# Allegro board DPU-A3-0D15 - Copy.brd
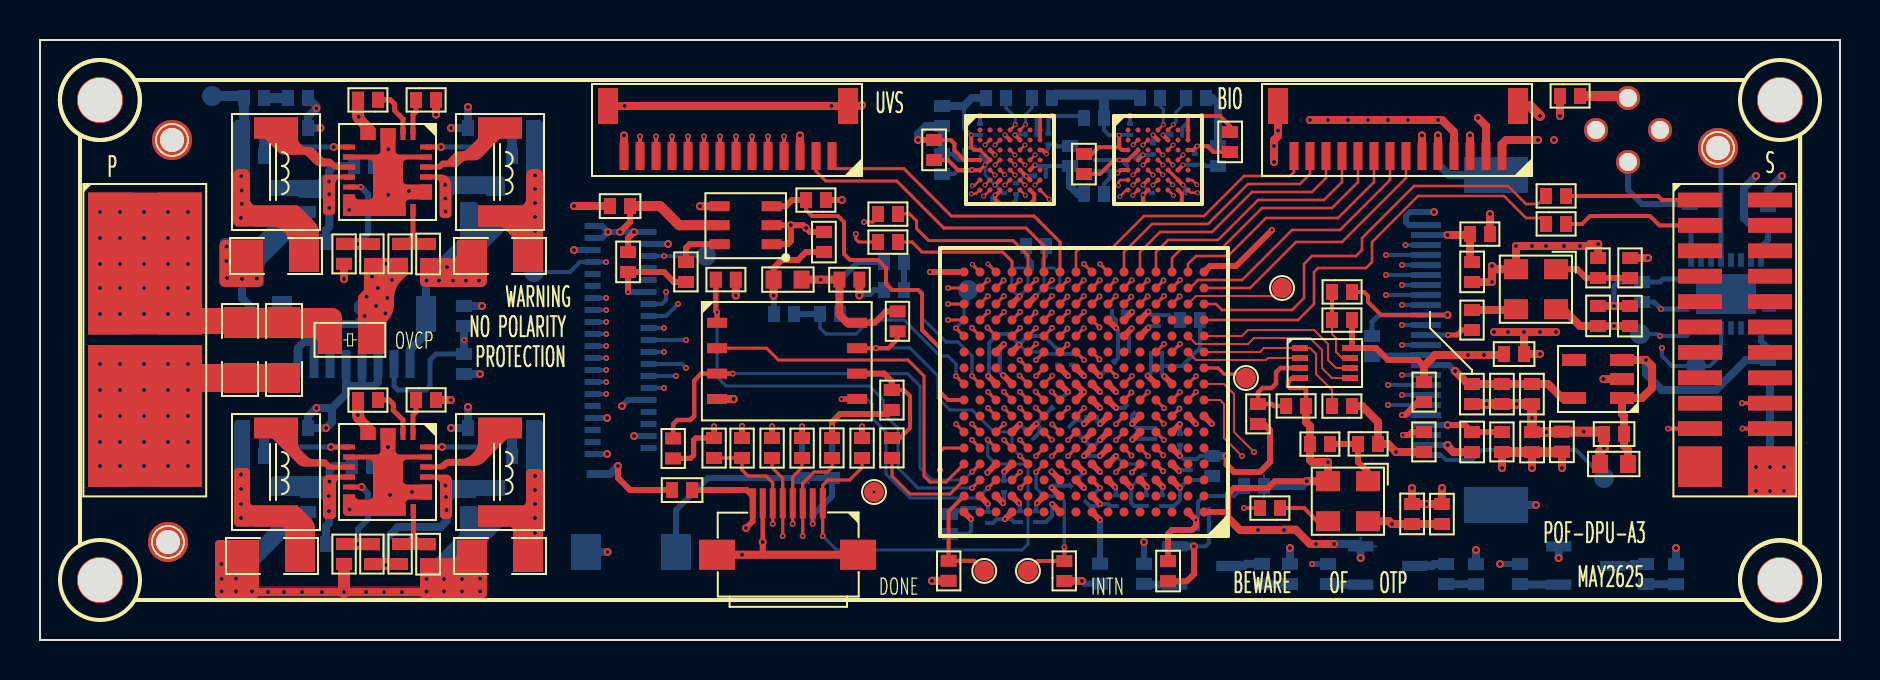
[diagram p0: board, top side]
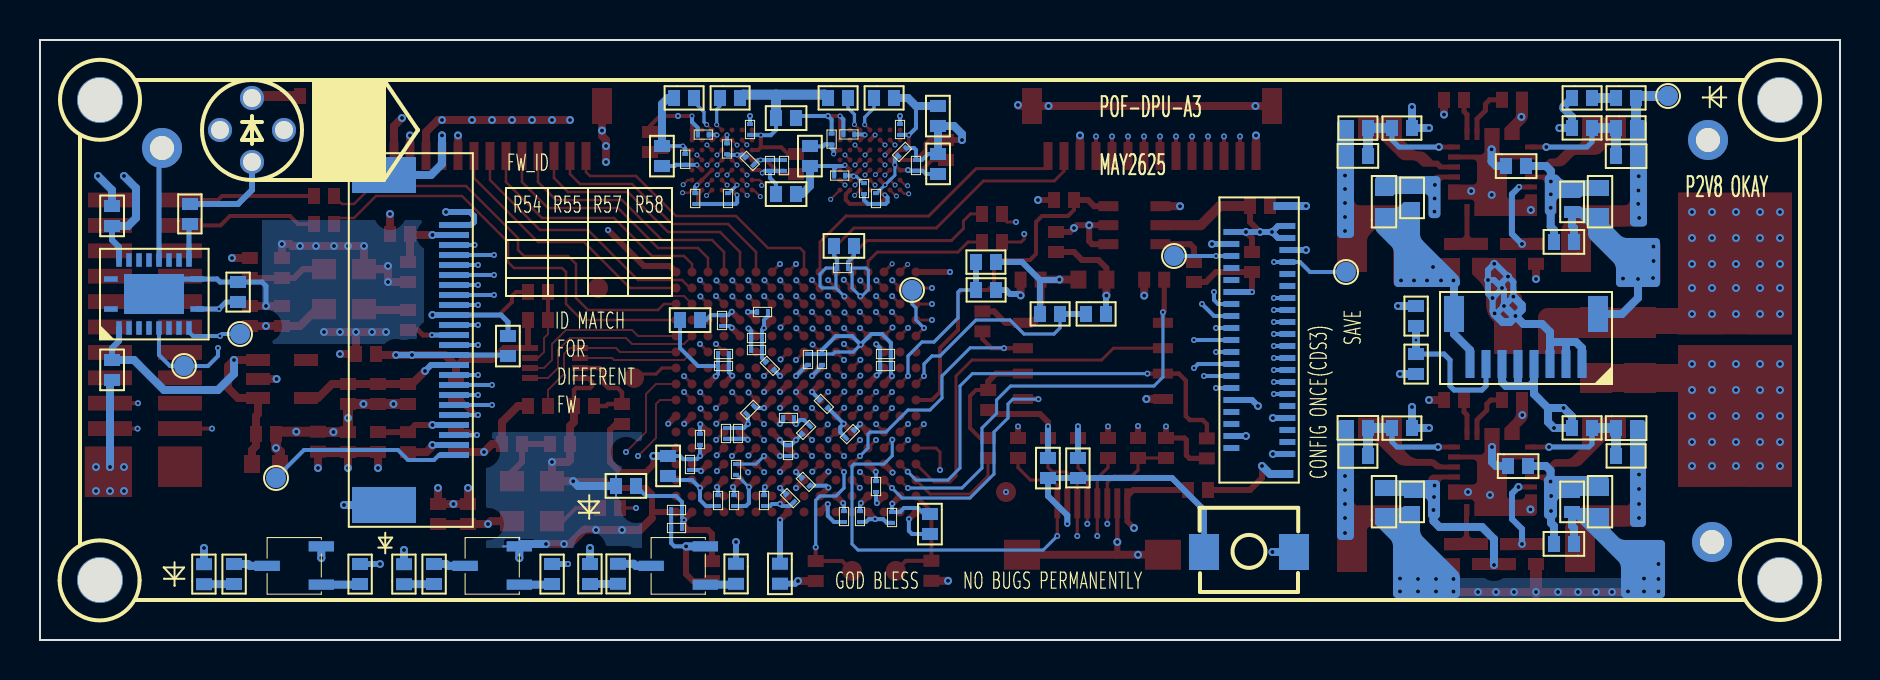
[diagram p1: board, bottom side, seen from below]

Outline 90 x 30 mm; copper layers: TOP, GND-2, SIG-3, VCC-4, GND-5, SIG-6, GND-7, BOTTOM. Coordinates in mm from the lower left corner of the outline.
Outline path: 0,30 90,30 90,0 0,0 0,30

## Design rules (mm)
constraint set DEFAULT: min track width 0.102, pair gap 0.2
net group CK: nets H1_D15 H1_RWDS1
net group DVP_MCLK: nets DVP_MCLK N763219
net group IO_LED_1: nets IO_LED_1 N1593321
net group IO_LED_2: nets IO_LED_2 N1593325
net group IO_LED_3: nets IO_LED_3 N1593329
net group MCLK: nets MCLK N900708
net group MIPI1_CLK: nets MIPI1_CLK+ MIPI1_CLK-
net group MIPI1_D0: nets MIPI1_D0+ MIPI1_D0-
net group MIPI1_D1: nets MIPI1_D1+ MIPI1_D1-
net group MIPI2_CLK: nets MIPI2_CLK+ MIPI2_CLK-
net group MIPI2_D0: nets MIPI2_D0+ MIPI2_D0-
net group MIPI2_D1: nets MIPI2_D1+ MIPI2_D1-
net group N2602705: nets N2602705 N2606298
net group P2V8: nets N1599549 N1613601
net group SYS_CLK: nets N990230 SYS_CLK
net group H1_CK: nets H1_CKN
net group H2_CK: nets H2_CKN
net group MG1: nets H2_CKP H2_D0 H2_D1 H2_D2 H2_D3 H2_D4 H2_D5 H2_D6 H2_D7 H2_D8 H2_D9 H2_D10 H2_D12 H2_D13 H2_D14 H2_D15 H2_RWDS0 H2_RWDS1
net group MG2: nets H1_CKP H1_CS H1_D0 H1_D1 H1_D2 H1_D3 H1_D4 H1_D5 H1_D6 H1_D7 H1_D8 H1_D9 H1_D10 H1_D11 H1_D12 H1_D13 H1_D14 H1_RWDS0
net group MG_BT1120: nets BT1120_CLK BT1120_D0 BT1120_D1 BT1120_D2 BT1120_D3 BT1120_D4 BT1120_D5 BT1120_D6 BT1120_D7 SYNC_O
net group MG_DATABUS_0_7: nets H2_D11
net group MG_DATABUS_8_15: nets IR_D2
net group MG_DVP: nets DVP_D0 DVP_D1 DVP_D2 DVP_D3 DVP_D4 DVP_D5 DVP_D6 DVP_D7 DVP_HSYNC DVP_PCLK DVP_VSYNC
net group MG_IR_CAM: nets IR_D0 IR_D1 IR_D3 IR_D4 IR_D5 IR_D6 IR_D7 IR_D8 IR_D9 IR_D10 IR_D11 IR_D12 IR_D13 IR_HSYNC IR_PCLK IR_VSYNC
net group P1V2: nets N2071731 N2071821 P1V2
nets with their own width: min track width 0.102; nets N849077

## Placement (name value [footprint] x y rotation side)
C1  10uF  [C0402_SMT]  59.5 24.4 90 top
C2  10uF  [C0402_SMT]  44.7 24 90 top
C3  10uF  [C0402_SMT]  52.2 24.3 270 top
C4  10uF  [C0402_SMT]  28.5 21.7 0 top
C5  10uF  [C0402_SMT]  39.2 20.4 270 top
C6  1uF  [C0402_SMT]  19.4 18.8 90 top
C7  33uF  [C1206_SMT]  13.4 20 180 top
C8  47uF  [C1206_SMT]  24.6 20 180 top
C9  10uF  [C0402_SMT]  29.4 18.4 90 top
C10  0.1uF  [C0402_SMT]  71.6 17.9 90 top
C11  22uF  [C0603_SMT]  36.68 18.02 0 top
C12  0.1uF  [C0402_SMT]  39.97 18.02 0 top
C13  0.1uF  [C0402_SMT]  77.9 15.7 90 top
C14  10uF  [C0402_SMT]  79.5 16.7 270 top
C15  33uF  [C1206_SMT]  9.2 16.1 270 top
C16  33uF  [C1206_SMT]  11.4 16.1 270 top
C17  0.1uF  [C0402_SMT]  73.2 14.3 0 top
C18  0.1uF  [C0402_SMT]  71.6 12.8 270 top
C19  10uF  [C0402_SMT]  73.1 12.8 270 top
C20  10uF  [C0402_SMT]  74.6 12.8 270 top
C21  0.1uF  [C0402_SMT]  78.2 10.3 0 top
C22  0.1uF  [C0402_SMT]  71.6 9.39 90 top
C23  10uF  [C0402_SMT]  74.6 9.39 90 top
C24  10uF  [C0402_SMT]  76.1 10.41 270 top
C25  22uF  [C0603_SMT]  79.4 8.8 180 top
C26  10uF  [C0402_SMT]  31.6 7.5 0 top
C27  0.1uF  [C0402_SMT]  68.6 5.8 90 top
C28  10uF  [C0402_SMT]  70.1 6.8 270 top
C29  1uF  [C0402_SMT]  19.4 3.79 90 top
C30  33uF  [C1206_SMT]  13.2 5 180 top
C31  47uF  [C1206_SMT]  24.6 5 180 top
C32  10uF  [C0402_SMT]  56.4 2.94 90 top
C33  10uF  [C0402_SMT]  45.1 26.7 270 bottom
C34  10uF  [C0402_SMT]  53.2 26.1 180 bottom
C35  0.1uF  [C0201_SMT]  57.24 21.8 90 bottom
C36  0.1uF  [C0201_SMT]  54.5 25.8 270 bottom
C37  0.1uF  [C0201_SMT]  49.83 25.28 180 bottom
C38  0.1uF  [C0201_SMT]  47 25.8 270 bottom
C39  0.1uF  [C0201_SMT]  54.32 23.76 45 bottom
C40  0.1uF  [C0201_SMT]  46.7 24.6 315 bottom
C41  39pF  [C0402_SMT]  23.6 24.2 0 bottom
C42  20pF  [C0402_SMT]  11.2 24.2 180 bottom
C43  10uF  [C0402_SMT]  58.9 24.7 270 bottom
C44  10uF  [C0402_SMT]  51.5 24.7 270 bottom
C45  0.1uF  [C0201_SMT]  57.74 23.76 90 bottom
C46  0.1uF  [C0201_SMT]  50.42 25.32 270 bottom
C47  0.1uF  [C0201_SMT]  55.65 24.83 270 bottom
C48  0.1uF  [C0201_SMT]  50.29 23.22 180 bottom
C49  10uF  [C0402_SMT]  45.1 23.3 90 bottom
C50  0.1uF  [C0201_SMT]  53.5 24 270 bottom
C51  0.1uF  [C0201_SMT]  52.8 24 270 bottom
C52  0.1uF  [C0201_SMT]  46.2 24 270 bottom
C53  10uF  [C0402_SMT]  16.7 23.7 180 bottom
C54  0.1uF  [C0201_SMT]  57.11 25.27 180 bottom
C55  0.1uF  [C0201_SMT]  48.8 22.3 90 bottom
C56  10uF  [C0402_SMT]  53.2 22.3 180 bottom
C57  0.1uF  [C0402_SMT]  21.4 21.6 90 bottom
C58  0.1uF  [C0201_SMT]  55.6 21.8 90 bottom
C59  0.1uF  [C0201_SMT]  48.2 21.8 90 bottom
C60  22uF  [C0603_SMT]  22.8 21.2 90 bottom
C61  22uF  [C0603_SMT]  12 21.2 90 bottom
C62  0.1uF  [C0402_SMT]  13.4 21.4 90 bottom
C63  0.1uF  [C0402_SMT]  86.4 20.7 90 bottom
C64  10uF  [C0402_SMT]  13.3 19.9 0 bottom
C65  10uF  [C0402_SMT]  49.3 19.7 0 bottom
C66  4.7uF  [C0201_SMT]  49.6 18.6 0 bottom
C67  0.1uF  [C0201_SMT]  53.6 16.4 0 bottom
C68  10uF  [C0402_SMT]  58 16 180 bottom
C69  4.7uF  [C0201_SMT]  55.9 15.7 90 bottom
C70  0.1uF  [C0201_SMT]  53.9 15.1 0 bottom
C71  0.1uF  [C0402_SMT]  66.6 15.2 270 bottom
C72  4.7uF  [C0201_SMT]  53.9 14.5 0 bottom
C73  4.7uF  [C0201_SMT]  56.1 14.3 180 bottom
C74  0.1uF  [C0201_SMT]  48 14.3 180 bottom
C75  4.7uF  [C0201_SMT]  51.6 14.3 270 bottom
C76  0.1uF  [C0201_SMT]  50.9 14.3 270 bottom
C77  4.7uF  [C0201_SMT]  53.7 13.9 225 bottom
C78  0.1uF  [C0201_SMT]  56.1 13.7 180 bottom
C79  0.1uF  [C0201_SMT]  47.45 13.7 0 bottom
C80  0.1uF  [C0402_SMT]  86.4 13 90 bottom
C81  0.1uF  [C0201_SMT]  51 12 225 bottom
C82  0.1uF  [C0201_SMT]  54.3 11.7 315 bottom
C83  0.1uF  [C0201_SMT]  52.3 11.1 0 bottom
C84  200pF  [C0402_SMT]  23.6 10.6 0 bottom
C85  100pF  [C0402_SMT]  11.2 10.6 180 bottom
C86  0.1uF  [C0201_SMT]  51.5 10.7 315 bottom
C87  0.1uF  [C0201_SMT]  55.7 10.6 270 bottom
C88  4.7uF  [C0201_SMT]  55.1 10.6 270 bottom
C89  4.7uF  [C0201_SMT]  49.7 10.1 135 bottom
C90  0.1uF  [C0201_SMT]  57 10.3 270 bottom
C91  4.7uF  [C0201_SMT]  52.6 9.2 90 bottom
C92  0.1uF  [C0201_SMT]  57.5 8.5 90 bottom
C93  10uF  [C0402_SMT]  58.6 8.2 90 bottom
C94  10uF  [C0402_SMT]  16.6 8.7 180 bottom
C95  470nF  [C0402_SMT]  39.6 9.1 270 bottom
C96  0.1uF  [C0201_SMT]  55.2 8.8 270 bottom
C97  0.1uF  [C0201_SMT]  51.9 8.1 225 bottom
C98  10uF  [C0402_SMT]  60.2 7.7 0 bottom
C99  0.1uF  [C0201_SMT]  48.2 7.4 90 bottom
C100  0.1uF  [C0201_SMT]  52.3 6.9 45 bottom
C101  0.1uF  [C0201_SMT]  56.1 6.7 90 bottom
C102  0.1uF  [C0201_SMT]  55.3 6.7 90 bottom
C103  4.7uF  [C0201_SMT]  53.8 6.7 90 bottom
C104  22uF  [C0603_SMT]  22.8 6.2 90 bottom
C105  22uF  [C0603_SMT]  12 6.2 90 bottom
C106  0.1uF  [C0402_SMT]  21.4 6.4 90 bottom
C107  0.1uF  [C0402_SMT]  13.4 6.4 90 bottom
C108  0.1uF  [C0201_SMT]  57.9 6.5 0 bottom
C109  0.1uF  [C0201_SMT]  49.8 5.9 90 bottom
C110  0.1uF  [C0201_SMT]  49 5.9 90 bottom
C111  0.1uF  [C0201_SMT]  47.4 6.4 270 bottom
C112  10uF  [C0402_SMT]  45.5 6.3 270 bottom
C113  0.1uF  [C0201_SMT]  57.9 5.6 0 bottom
C114  10uF  [C0402_SMT]  13.3 4.8 0 bottom
C115  10uF  [C0402_SMT]  53 3.82 270 bottom
D1  LED  [LED0402_SMT]  11.2 27.1 180 bottom
D2  LED  [LED0402_SMT]  62.5 2.8 90 bottom
D3  LED  [LED0402_SMT]  81.8 2.79 90 bottom
D4  LED  [LED0402_SMT]  71.8 2.79 90 bottom
F1  1AMP  [R0805]  14.5 15 0 top
FB1  BLM15PD121SN1D  [L0402_SMT]  72.5 20.3 180 top
FB2  BLM15PD121SN1D  [L0402_SMT]  73.1 9.4 90 top
J1  CONN-1X14P-0.8MM  [CONN-1X14P-0D8]  39.6 24.2 180 top
J2  CONN-1X14P-0.8MM  [CONN-1X14P-0D8]  73.1 24.2 180 top
J3  CONN-24P  [SMD_CONN_2X12P_1D27]  7 22 270 top
J4  CONN-24P  [SMD_CONN_2X12P_1D27]  86.5 22 270 top
J5  CONN-1X8  [FPC-0D5-8P]  39.14 6.84 180 top
J6  CONN-1X8P-0.8MM  [CONN-1X8P-0D8]  12.9 13.8 0 bottom
J7  Hirose FH35C-39S-0.3SHW  [FH35C-39S-0D3SHW]  27.63 15 90 bottom
J8  FPC-05F-24PH20  [FPC-0D5-24P]  69.3 20.75 270 bottom
L1  1uH/1A  [IND_SMD_4D4X4D2]  11.8 25.6 270 top
L2  1uH/1A  [IND_SMD_4D4X4D2]  23 25.6 270 top
L3  1uH/1A  [IND_SMD_4D4X4D2]  11.8 10.6 270 top
L4  1uH/1A  [IND_SMD_4D4X4D2]  23 10.6 270 top
LD1  LaserDiode  [LD_CIR_THR_4P]  79.4 25.5 270 bottom
NOREF  -  [unnamed]  87 3 0 top
NOREF#2  -  [#2]  0 30 0 top
NOREF#3  -  [unnamed]  87 27 0 top
NOREF#4  -  [unnamed]  3 27 0 top
NOREF#5  -  [unnamed]  3 3 0 top
NOREF#6  -  [#2]  0 0 90 top
Q1  MMBT2222ALT1G  [SOT-23-3]  75.5 2.29 90 bottom
Q2  MMBT2222ALT1G  [SOT-23-3]  65.6 2.29 90 bottom
Q3  MMBT2222ALT1G  [SOT-23-3]  56.3 2.29 90 bottom
R1  DNI  [R0402_SMT]  76 27.2 0 top
R2  10K  [R0402_SMT]  16.9 27.01 180 top
R3  10K  [R0402_SMT]  18.8 27 0 top
R4  0R  [R0402_SMT]  75.3 22.2 0 top
R5  100K  [R0402_SMT]  39.3 22 180 top
R6  0R  [R0402_SMT]  42.9 21.3 180 top
R7  0R  [R0402_SMT]  75.3 20.8 0 top
R8  0R  [R0402_SMT]  42.9 19.9 180 top
R9  DNP  [R0402_SMT]  15.2 19.81 270 top
R10  0R  [R0402_SMT]  16.6 18.8 90 top
R11  10R  [R0402_SMT]  18 19.81 270 top
R12  DNP  [R0402_SMT]  77.91 18.1 90 top
R13  0R  [R0402_SMT]  79.5 18.1 90 top
R14  1K  [R0402_SMT]  32.3 17.9 90 top
R15  4.7K  [R0402_SMT]  33.79 18.02 0 top
R16  DNP  [R0402_SMT]  64.6 17.4 0 top
R17  10K  [R0402_SMT]  65.6 16 180 top
R18  33R  [R0402_SMT]  71.59 16.5 270 top
R19  4.7K  [R0402_SMT]  42.88 15.43 90 top
R20  10K  [R0402_SMT]  69.2 12.9 270 top
R21  10K  [R0402_SMT]  18.8 12 0 top
R22  10K  [R0402_SMT]  16.9 12 180 top
R23  DNP  [R0402_SMT]  42.59 12.5 270 top
R24  DNP  [R0402_SMT]  62.3 11.7 0 top
R25  10K  [R0402_SMT]  65.6 11.7 180 top
R26  10K  [R0402_SMT]  60.9 10.8 90 top
R27  10K  [R0402_SMT]  69.2 9.4 90 top
R28  0R  [R0402_SMT]  65.9 9.8 0 top
R29  DNP  [R0402_SMT]  64.5 9.8 180 top
R30  2.2K  [R0402_SMT]  39.6 9.1 90 top
R31  33R  [R0402_SMT]  42.6 9.1 90 top
R32  1K  [R0402_SMT]  33.7 10.1 270 top
R33  DNP  [R0402_SMT]  35.1 10.1 270 top
R34  4.7K  [R0402_SMT]  36.6 10.1 270 top
R35  4.7K  [R0402_SMT]  38.1 10.1 270 top
R36  4.7K  [R0402_SMT]  41.1 10.1 270 top
R37  4.7K  [R0402_SMT]  31.66 10.08 270 top
R38  33R  [R0402_SMT]  62 6.6 180 top
R39  DNP  [R0402_SMT]  15.2 4.8 270 top
R40  0R  [R0402_SMT]  16.6 3.79 90 top
R41  10R  [R0402_SMT]  18 4.8 270 top
R42  4.7K  [R0402_SMT]  45.43 3.96 270 top
R43  4.7K  [R0402_SMT]  51.22 2.95 90 top
R44  2.2K  [R0402_SMT]  58.3 27.1 180 bottom
R45  2.2K  [R0402_SMT]  56 27.1 180 bottom
R46  2.2K  [R0402_SMT]  50.6 27.1 180 bottom
R47  2.2K  [R0402_SMT]  48.3 27.1 180 bottom
R48  20K  [R0402_SMT]  13.4 27.1 180 bottom
R49  48K  [R0402_SMT]  13.4 25.6 180 bottom
R50  120K  [R0402_SMT]  11.2 25.6 180 bottom
R51  125K  [R0402_SMT]  23.6 25.6 0 bottom
R52  100K  [R0402_SMT]  21.4 25.6 0 bottom
R53  DNI  [R0402_SMT]  82.5 20.8 90 bottom
R54  DNP  [R0402_SMT]  42.2 18.9 0 bottom
R55  0R  [R0402_SMT]  43.2 17.5 180 bottom
R56  100K  [R0402_SMT]  80.1 17.9 270 bottom
R57  DNP  [R0402_SMT]  40 16.3 180 bottom
R58  0R  [R0402_SMT]  37.7 16.3 180 bottom
R59  DNP  [R0402_SMT]  21.2 16.7 270 bottom
R60  100K  [R0402_SMT]  21.2 14.3 270 bottom
R61  100K  [R0402_SMT]  13.4 10.6 180 bottom
R62  100K  [R0402_SMT]  21.4 10.6 0 bottom
R63  49.9K  [R0402_SMT]  11.2 9.2 180 bottom
R64  24.9K  [R0402_SMT]  23.6 9.2 0 bottom
R65  4.7K  [R0402_SMT]  38.1 8.1 90 bottom
R66  20K  [R0402_SMT]  61.1 3.81 270 bottom
R67  1K  [R0402_SMT]  55.2 3.81 270 bottom
R68  20K  [R0402_SMT]  80.3 3.8 270 bottom
R69  1K  [R0402_SMT]  74 3.8 270 bottom
R70  20K  [R0402_SMT]  70.3 3.8 270 bottom
R71  1K  [R0402_SMT]  64.4 3.8 270 bottom
SW1  SW KEY-SPST  [SW_SMD_2P_L3D9_W3D0_P4D5]  27.3 4.4 0 bottom
TP1  T POINT R  [TP_THR_CIR_2D0_1D2]  6.6 25 0 top
TP2  T POINT R  [TP_THR_CIR_2D0_1D2]  83.9 24.6 0 top
TP3  T POINT F  [TP_SMD_1D0_NP]  62.1 17.6 0 top
TP4  T POINT F  [TP_SMD_1D0_NP]  60.3 13.1 0 top
TP5  T POINT F  [TP_SMD_1D0_NP]  41.7 7.4 0 top
TP6  T POINT R  [TP_THR_CIR_2D0_1D2]  6.4 4.9 0 top
TP7  T POINT F  [TP_SMD_1D0_NP]  47.21 3.45 0 top
TP8  T POINT F  [TP_SMD_1D0_NP]  49.4 3.45 0 top
TP9  T POINT F  [TP_SMD_1D0_NP]  8.6 27.2 180 bottom
TP10  T POINT F  [TP_SMD_1D0_NP]  46.4 17.5 180 bottom
TP11  T POINT F  [TP_SMD_1D0_NP]  80 15.3 180 bottom
TP12  T POINT F  [TP_SMD_1D0_NP]  82.8 13.7 180 bottom
TP13  T POINT F  [TP_SMD_1D0_NP]  78.2 8.1 180 bottom
TP14  T POINT F  [TP_SMD_1D0_NP]  33.3 19.2 180 bottom
TP15  T POINT F  [TP_SMD_1D0_NP]  24.7 18.4 180 bottom
U1  W958D6NBKX4I  [WFBGA-49]  47 25.5 0 top
U2  W958D6NBKX4I  [WFBGA-49]  54.4 25.5 0 top
U3  MAX20416ATGD/V+  [TQFN-24]  17.4 23.4 180 top
U4  TPS22995HQDDCRQ1  [SOT-23-6]  36.58 19.79 180 top
U5  W25Q64JWSSIQ  [SOP-8-208MIL]  40.85 15.86 270 top
U6  CAT25512HU5I-GT3  [UDFN-8-2X3]  65.5 14.6 270 top
U7  TLV75515PDBVR  [SOT-23-5]  79.1 12.1 180 top
U8  LIFCL-40-7BG256I  [CABGA-256]  58.2 6.4 180 top
U9  MAX20416ATGD/V+  [TQFN-24]  17.4 8.4 180 top
U10  TXS0108ERGYR  [VQFN-20]  84.3 17.3 180 bottom
Y1  24.0MHz  [SMD2520-4P]  74.8 17.5 180 top
Y2  25.0MHz  [SMD2520-4P]  65.4 6.9 180 top

## Library data of the parts
C1-C6 C9 C10 C12-C14 C17 C18 C20-C24 C26-C29 C32-C115 = CAP NP: signal model: DEFAULT_CAPACITOR_1e+07pF_2_1
C7 C8 C11 C15 C16 C19 C25 C30 C31 = CAP NP: signal model: DEFAULT_CAPACITOR_2.2e+07pF_2_1
D1-D4 = LED
F1 = FUSE
FB1 FB2 = INDUCTOR
J1 J2 = CONN-1X14P
J3 J4 = CONN-24P
J5 = CONN-1X8
J6 = CONN-1X8P
J7 = HiroseFPC_0
J8 = OV5640-FPC-24P-DVP
L1-L4 = INDUCTOR: signal model: DEFAULT_INDUCTOR_4700nH_2_1
LD1 = LaserDiode_0
Q1-Q3 = MMBT2222AL
R1-R3 R9-R13 R15-R47 R49-R65 R67 R69 R71 = R: signal model: DEFAULT_RESISTOR_10000OHM_2_1
R4-R8 R14 R48 R66 R68 R70 = R
SW1 = SW KEY-SPST
TP1 TP2 TP6 = T POINT R
TP3-TP5 TP7-TP15 = T POINT F
U1 U2 = W958D6NBKX4I
U3 U9 = MAX20416ATGD/V+
U4 = TPS22995H-Q1
U5 = GD25Q128ESIGR
U6 = CAT25512HU5I-GT3
U7 = TLV75515PDBVR
U8 = LIFCL-40-BG256
U10 = TXS0108ERGYR
Y1 Y2 = OSCILLATOR

## Footprints (pads in the part's own frame, mm; a bottom-side part is the same pattern mirrored in y, then rotated)
C0201_SMT
  rect 0.2x0.3 smd: 1(0,0) 2(0.544,0)
C0402_SMT
  rect 0.6x0.8 smd: 1(0,0) 2(1,0)
C0603_SMT
  rect 0.8x0.9 smd: 1(0,0) 2(1.4,0)
C1206_SMT
  rect 1.5x1.6 smd: 1(0.2,0.8) 2(3,0.8)
CABGA-256
  round 0.45 smd: A1(0,0) A2(0.8,0) A3(1.6,0) A4(2.4,0) A5(3.2,0) A6(4,0) A7(4.8,0) A8(5.6,0) A9(6.4,0) A10(7.2,0) A11(8,0) A12(8.8,0) A13(9.6,0) A14(10.4,0) A15(11.2,0) A16(12,0) B1(0,-0.8) B2(0.8,-0.8) B3(1.6,-0.8) B4(2.4,-0.8) B5(3.2,-0.8) B6(4,-0.8) B7(4.8,-0.8) B8(5.6,-0.8) B9(6.4,-0.8) B10(7.2,-0.8) B11(8,-0.8) B12(8.8,-0.8) B13(9.6,-0.8) B14(10.4,-0.8) B15(11.2,-0.8) B16(12,-0.8) C1(0,-1.6) C2(0.8,-1.6) C3(1.6,-1.6) C4(2.4,-1.6) C5(3.2,-1.6) C6(4,-1.6) C7(4.8,-1.6) C8(5.6,-1.6) C9(6.4,-1.6) C10(7.2,-1.6) C11(8,-1.6) C12(8.8,-1.6) C13(9.6,-1.6) C14(10.4,-1.6) C15(11.2,-1.6) C16(12,-1.6) D1(0,-2.4) D2(0.8,-2.4) D3(1.6,-2.4) D4(2.4,-2.4) D5(3.2,-2.4) D6(4,-2.4) D7(4.8,-2.4) D8(5.6,-2.4) D9(6.4,-2.4) D10(7.2,-2.4) D11(8,-2.4) D12(8.8,-2.4) D13(9.6,-2.4) D14(10.4,-2.4) D15(11.2,-2.4) D16(12,-2.4) E1(0,-3.2) E2(0.8,-3.2) E3(1.6,-3.2) E4(2.4,-3.2) E5(3.2,-3.2) E6(4,-3.2) E7(4.8,-3.2) E8(5.6,-3.2) E9(6.4,-3.2) E10(7.2,-3.2) E11(8,-3.2) E12(8.8,-3.2) E13(9.6,-3.2) E14(10.4,-3.2) E15(11.2,-3.2) E16(12,-3.2) F1(0,-4) F2(0.8,-4) F3(1.6,-4) F4(2.4,-4) F5(3.2,-4) F6(4,-4) F7(4.8,-4) F8(5.6,-4) F9(6.4,-4) F10(7.2,-4) F11(8,-4) F12(8.8,-4) F13(9.6,-4) F14(10.4,-4) F15(11.2,-4) F16(12,-4) G1(0,-4.8) G2(0.8,-4.8) G3(1.6,-4.8) G4(2.4,-4.8) G5(3.2,-4.8) G6(4,-4.8) G7(4.8,-4.8) G8(5.6,-4.8) G9(6.4,-4.8) G10(7.2,-4.8) G11(8,-4.8) G12(8.8,-4.8) G13(9.6,-4.8) G14(10.4,-4.8) G15(11.2,-4.8) G16(12,-4.8) H1(0,-5.6) H2(0.8,-5.6) H3(1.6,-5.6) H4(2.4,-5.6) H5(3.2,-5.6) H6(4,-5.6) H7(4.8,-5.6) H8(5.6,-5.6) H9(6.4,-5.6) H10(7.2,-5.6) H11(8,-5.6) H12(8.8,-5.6) H13(9.6,-5.6) H14(10.4,-5.6) H15(11.2,-5.6) H16(12,-5.6) J1(0,-6.4) J2(0.8,-6.4) J3(1.6,-6.4) J4(2.4,-6.4) J5(3.2,-6.4) J6(4,-6.4) J7(4.8,-6.4) J8(5.6,-6.4) J9(6.4,-6.4) J10(7.2,-6.4) J11(8,-6.4) J12(8.8,-6.4) J13(9.6,-6.4) J14(10.4,-6.4) J15(11.2,-6.4) J16(12,-6.4) K1(0,-7.2) K2(0.8,-7.2) K3(1.6,-7.2) K4(2.4,-7.2) K5(3.2,-7.2) K6(4,-7.2) K7(4.8,-7.2) K8(5.6,-7.2) K9(6.4,-7.2) K10(7.2,-7.2) K11(8,-7.2) K12(8.8,-7.2) K13(9.6,-7.2) K14(10.4,-7.2) K15(11.2,-7.2) K16(12,-7.2) L1(0,-8) L2(0.8,-8) L3(1.6,-8) L4(2.4,-8) L5(3.2,-8) L6(4,-8) L7(4.8,-8) L8(5.6,-8) L9(6.4,-8) L10(7.2,-8) L11(8,-8) L12(8.8,-8) L13(9.6,-8) L14(10.4,-8) L15(11.2,-8) L16(12,-8) M1(0,-8.8) M2(0.8,-8.8) M3(1.6,-8.8) M4(2.4,-8.8) M5(3.2,-8.8) M6(4,-8.8) M7(4.8,-8.8) M8(5.6,-8.8) M9(6.4,-8.8) M10(7.2,-8.8) M11(8,-8.8) M12(8.8,-8.8) M13(9.6,-8.8) M14(10.4,-8.8) M15(11.2,-8.8) M16(12,-8.8) N1(0,-9.6) N2(0.8,-9.6) N3(1.6,-9.6) N4(2.4,-9.6) N5(3.2,-9.6) N6(4,-9.6) N7(4.8,-9.6) N8(5.6,-9.6) N9(6.4,-9.6) N10(7.2,-9.6) N11(8,-9.6) N12(8.8,-9.6) N13(9.6,-9.6) N14(10.4,-9.6) N15(11.2,-9.6) N16(12,-9.6) P1(0,-10.4) P2(0.8,-10.4) P3(1.6,-10.4) P4(2.4,-10.4) P5(3.2,-10.4) P6(4,-10.4) P7(4.8,-10.4) P8(5.6,-10.4) P9(6.4,-10.4) P10(7.2,-10.4) P11(8,-10.4) P12(8.8,-10.4) P13(9.6,-10.4) P14(10.4,-10.4) P15(11.2,-10.4) P16(12,-10.4) R1(0,-11.2) R2(0.8,-11.2) R3(1.6,-11.2) R4(2.4,-11.2) R5(3.2,-11.2) R6(4,-11.2) R7(4.8,-11.2) R8(5.6,-11.2) R9(6.4,-11.2) R10(7.2,-11.2) R11(8,-11.2) R12(8.8,-11.2) R13(9.6,-11.2) R14(10.4,-11.2) R15(11.2,-11.2) R16(12,-11.2) T1(0,-12) T2(0.8,-12) T3(1.6,-12) T4(2.4,-12) T5(3.2,-12) T6(4,-12) T7(4.8,-12) T8(5.6,-12) T9(6.4,-12) T10(7.2,-12) T11(8,-12) T12(8.8,-12) T13(9.6,-12) T14(10.4,-12) T15(11.2,-12) T16(12,-12)
CONN-1X8P-0D8
  rect 0.45x1.4 smd: 1(0,0) 2(0.8,0) 3(1.6,0) 4(2.4,0) 5(3.2,0) 6(4,0) 7(4.8,0) 8(5.6,0)
  rect 1x1.8 smd: 9(-0.8,-2.5) 10(6.4,-2.5)
CONN-1X14P-0D8
  rect 0.45x1.4 smd: 1(0,0) 2(0.8,0) 3(1.6,0) 4(2.4,0) 5(3.2,0) 6(4,0) 7(4.8,0) 8(5.6,0) 9(6.4,0) 10(7.2,0) 11(8,0) 12(8.8,0) 13(9.6,0) 14(10.4,0)
  rect 1x1.8 smd: 15(11.2,-2.5) 16(-0.8,-2.5)
FH35C-39S-0D3SHW
  rect 0.3x0.8 smd: 1(5.7,0) 2(5.4,2.8) 3(5.1,0) 4(4.8,2.8) 5(4.5,0) 6(4.2,2.8) 7(3.9,0) 8(3.6,2.8) 9(3.3,0) 10(3,2.8) 11(2.7,0) 12(2.4,2.8) 13(2.1,0) 14(1.8,2.8) 15(1.5,0) 16(1.2,2.8) 17(0.9,0) 18(0.6,2.8) 19(0.3,0) 20(0,2.8) 21(-0.3,0) 22(-0.6,2.8) 23(-0.9,0) 24(-1.2,2.8) 25(-1.5,0) 26(-1.8,2.8) 27(-2.1,0) 28(-2.4,2.8) 29(-2.7,0) 30(-3,2.8) 31(-3.3,0) 32(-3.6,2.8) 33(-3.9,0) 34(-4.2,2.8) 35(-4.5,0) 36(-4.8,2.8) 37(-5.1,0) 38(-5.4,2.8) 39(-5.7,0)
  rect 0.4x1 smd: 40(6.7,0.2) 41(-6.7,0.2)
FPC-0D5-8P
  rect 0.3x1.5 smd: 1(0,0) 2(0.5,0) 3(1,0) 4(1.5,0) 5(2,0) 6(2.5,0) 7(3,0) 8(3.5,0)
  rect 1.8x1.5 smd: 9(-1.767,2.573) 10(5.283,2.573)
FPC-0D5-24P
  rect 0.3x1.5 smd: 1(11.5,0) 2(11,0) 3(10.5,0) 4(10,0) 5(9.5,0) 6(9,0) 7(8.5,0) 8(8,0) 9(7.5,0) 10(7,0) 11(6.5,0) 12(6,0) 13(5.5,0) 14(5,0) 15(4.5,0) 16(4,0) 17(3.5,0) 18(3,0) 19(2.5,0) 20(2,0) 21(1.5,0) 22(1,0) 23(0.5,0) 24(0,0)
  rect 1.8x3.2 smd: 25(-2.5,-3.5) 26(14,-3.5)
IND_SMD_4D4X4D2
  rect 1.05x2.2 smd: 1(0,0) 2(4.4,0)
L0402_SMT
  rect 0.6x0.8 smd: 1(0,0) 2(1,0)
LD_CIR_THR_4P
  round 1.2 hole 0.9: 1(1.6,0) 2(-1.6,0) 3(0,1.6) 4(0,-1.6)
LED0402_SMT
  rect 0.6x0.8 smd: 1(0,0) 2(1,0)
R0402_SMT
  rect 0.6x0.8 smd: 1(0,0) 2(1,0)
R0805
  rect 1.2x1.4 smd: 1(0,0) 2(2,0)
SMD2520-4P
  rect 1.2x1 smd: 1(-1,-1.04) 2(1,-1.04) 3(1,0.96) 4(-1,0.96)
SMD_CONN_2X12P_1D27
  rect 0.74x2.2 smd: 1(0,-3.5) 2(1.27,-3.5) 3(2.54,-3.5) 4(3.81,-3.5) 5(5.08,-3.5) 6(6.35,-3.5) 7(7.62,-3.5) 8(8.89,-3.5) 9(10.16,-3.5) 10(11.43,-3.5) 11(12.7,-3.5) 12(13.97,-3.5) 13(13.97,0) 14(12.7,0) 15(11.43,0) 16(10.16,0) 17(8.89,0) 18(7.62,0) 19(6.35,0) 20(5.08,0) 21(3.81,0) 22(2.54,0) 23(1.27,0) 24(0,0)
SOP-8-208MIL
  rect 0.5x1 smd: 1(0,-7) 2(1.27,-7) 3(2.54,-7) 4(3.81,-7) 5(3.81,0) 6(2.54,0) 7(1.27,0) 8(0,0)
SOT-23-3
  rect 0.51x1.27 smd: 1(0.476,0.434) 2(2.391,0.434) 3(1.415,3.142)
SOT-23-5
  rect 1.2x0.6 smd: 1(0,0) 2(0,-0.95) 3(0,-1.9) 4(2.4,-1.9) 5(2.4,0)
SOT-23-6
  rect 1x0.5 smd: 1(0,0) 2(0,-0.95) 3(0,-1.9) 4(2.6,-1.9) 5(2.6,-0.95) 6(2.6,0)
SW_SMD_2P_L3D9_W3D0_P4D5
  rect 1.5x1.8 smd: 1(0,0) 2(4.5,0)
TP_SMD_1D0_NP
  round 1 smd: 1(0,0)
TP_THR_CIR_2D0_1D2
  round 2 hole 1.2: 1(0,0)
TQFN-24
  rect 0.25x0.6 smd: 1(-1.25,-1.9) 2(-0.75,-1.9) 3(-0.25,-1.9) 4(0.25,-1.9) 5(0.75,-1.9) 6(1.25,-1.9) 13(1.25,1.9) 14(0.75,1.9) 15(0.25,1.9) 16(-0.25,1.9) 17(-0.75,1.9) 18(-1.25,1.9)
  rect 0.6x0.25 smd: 7(1.95,-1.25) 8(1.95,-0.75) 9(1.95,-0.25) 10(1.95,0.25) 11(1.95,0.75) 12(1.95,1.25) 19(-1.9,1.25) 20(-1.9,0.75) 21(-1.9,0.25) 22(-1.9,-0.25) 23(-1.9,-0.75) 24(-1.9,-1.25)
  rect 1.5x1.5 smd: EPAD(0,0)
UDFN-8-2X3
  rect 0.3x0.8 smd: 1(0,-2.5) 2(0.5,-2.5) 3(1,-2.5) 4(1.5,-2.5) 5(1.5,0) 6(1,0) 7(0.5,0) 8(0,0)
unnamed
  round 2.3 hole 2.2 unplated: (0,0)
VQFN-20
  rect 0.68x0.28 smd: 1(-2.157,-0.75) 10(2.158,-0.75) 11(2.158,0.75) 20(-2.157,0.75)
  rect 0.28x0.68 smd: 2(-1.75,-1.7) 3(-1.25,-1.7) 4(-0.75,-1.7) 5(-0.25,-1.7) 6(0.25,-1.7) 7(0.75,-1.7) 8(1.25,-1.7) 9(1.75,-1.7) 12(1.75,1.7) 13(1.25,1.7) 14(0.75,1.7) 15(0.25,1.7) 16(-0.25,1.7) 17(-0.75,1.7) 18(-1.25,1.7) 19(-1.75,1.7)
  rect 3x2 smd: EPAD(0,0)
WFBGA-49
  round 0.25 smd: A1(0,0) A2(0.5,0) A3(1,0) A4(1.5,0) A5(2,0) A6(2.5,0) A7(3,0) B1(0,-0.5) B2(0.5,-0.5) B3(1,-0.5) B4(1.5,-0.5) B5(2,-0.5) B6(2.5,-0.5) B7(3,-0.5) C1(0,-1) C2(0.5,-1) C3(1,-1) C4(1.5,-1) C5(2,-1) C6(2.5,-1) C7(3,-1) D1(0,-1.5) D2(0.5,-1.5) D3(1,-1.5) D4(1.5,-1.5) D5(2,-1.5) D6(2.5,-1.5) D7(3,-1.5) E1(0,-2) E2(0.5,-2) E3(1,-2) E4(1.5,-2) E5(2,-2) E6(2.5,-2) E7(3,-2) F1(0,-2.5) F2(0.5,-2.5) F3(1,-2.5) F4(1.5,-2.5) F5(2,-2.5) F6(2.5,-2.5) F7(3,-2.5) G1(0,-3) G2(0.5,-3) G3(1,-3) G4(1.5,-3) G5(2,-3) G6(2.5,-3) G7(3,-3)

## Nets
GND: C1.2 C2.2 C3.2 C4.1 C5.2 C6.1 C7.2 C8.2 C9.1 C10.1 C11.1 C12.2 C13.2 C14.1 C15.2 C16.2 C17.2 C18.2 C19.2 C20.2 C21.1 C22.1 C23.2 C24.1 C25.2 C26.1 C27.2 C28.1 C29.1 C30.2 C31.2 C32.1 C33.2 C34.2 C35.1 C36.1 C37.1 C38.1 C39.1 C40.1 C43.2 C44.2 C45.1 C46.1 C47.1 C48.1 C49.2 C50.1 C51.1 C52.1 C53.1 C54.1 C55.1 C56.2 C57.1 C58.1 C59.1 C60.1 C61.1 C62.1 C63.2 C64.1 C65.1 C66.1 C67.1 C68.1 C69.1 C70.1 C71.1 C72.1 C73.1 C74.2 C75.1 C76.1 C77.1 C78.1 C79.1 C80.1 C81.2 C82.2 C83.1 C86.1 C87.1 C88.1 C89.1 C90.1 C91.1 C92.1 C93.1 C94.1 C95.1 C96.2 C97.2 C98.2 C99.1 C100.1 C101.1 C102.1 C103.1 C104.1 C105.1 C106.1 C107.1 C108.2 C109.1 C110.1 C111.2 C112.2 C113.2 C114.1 C115.1 J1.3 J1.14 J1.15 J1.16 J2.4 J2.5 J2.6 J2.15 J2.16 J3.7 J3.8 J3.9 J3.10 J3.11 J3.12 J3.13 J3.14 J3.15 J3.16 J3.17 J3.18 J4.13 J4.14 J5.7 J5.9 J5.10 J6.4 J6.5 J6.6 J6.8 J6.9 J6.10 J7.4 J7.5 J7.12 J7.30 J7.33 J7.36 J7.39 J7.40 J7.41 J8.2 J8.15 J8.24 J8.25 J8.26 Q1.2(EMITTER) Q2.2(EMITTER) Q3.2(EMITTER) R1.1 R5.1 R9.2 R12.2 R14.1 R16.2 R23.2 R24.2 R29.2 R30.2 R33.1 R39.2 R48.1 R49.1 R52.1 R55.2 R56.1 R58.2 R60.2 R61.1 R62.1 SW1.1 TP6.1(TP) U1.A7 U1.B4 U1.B7 U1.C2 U1.D1 U1.E6 U1.G3 U1.G6(VSSQ#G6) U2.A7 U2.B4 U2.B7 U2.C2 U2.D1 U2.E6 U2.G3 U2.G6(VSSQ#G6) U3.3 U3.4 U3.8 U3.12 U3.13 U3.14 U3.15 U3.16 U3.17 U3.19 U3.20 U3.23 U3.EPAD U4.4 U5.4 U6.4 U7.2 U8.A1 U8.A8 U8.A10 U8.A13 U8.A16 U8.B8 U8.B10 U8.B14(VSSSD#B14) U8.C3 U8.C6 U8.C9 U8.C10 U8.D3 U8.D8 U8.D14 U8.E7 U8.E8 U8.F3 U8.F12 U8.G1 U8.G2 U8.G5 U8.G8 U8.H8 U8.H9 U8.J3 U8.J7 U8.J8 U8.J9 U8.J14 U8.L13 U8.M5 U8.N7 U8.P13 U8.T1 U8.T16 U9.3 U9.4 U9.8 U9.12 U9.13 U9.14 U9.15 U9.16 U9.17 U9.19 U9.20 U9.23 U9.EPAD U10.11 U10.EPAD Y1.2 Y2.2
P1V0: C31.1 C32.2 C75.2 C81.1 C82.1 C84.2 C96.1 C97.1 C98.1 C101.2 C102.2 C103.2 C108.1 C111.1 C112.1 C113.1 L4.2 R64.2 U8.A2 U8.B15 U8.C4 U8.C5 U8.C7 U8.D7 U8.D9 U8.H7 U8.J10 U8.K9
P1V2: C30.1 C85.2 L3.2 R63.2
P1V5: C18.1 C19.1 C20.1 J8.10 U7.5(OUT)
P1V8: C1.1 C2.1 C3.1 C8.1 C11.2 C12.1 C13.1 C14.2 C17.1 C21.2 C25.1 C26.2 C27.1 C28.2 C33.1 C34.1 C35.2 C36.2 C37.2 C38.2 C39.2 C40.2 C41.2 C43.1 C44.1 C45.2 C46.2 C47.2 C48.2 C49.1 C50.2 C51.2 C52.2 C54.2 C55.2 C56.1 C58.2 C59.2 C65.2 C66.2 C67.2 C68.2 C69.2 C70.2 C71.2 C72.2 C73.2 C74.1 C76.2 C77.2 C78.2 C79.2 C80.2 C83.2 C86.2 C87.2 C88.2 C89.2 C90.2 C91.2 C92.2 C93.2 C99.2 C100.2 C109.2 C110.2 C115.2 J2.2 J2.3 J5.8 J8.11 L2.2 R13.2 R15.2 R17.1 R19.2 R20.1 R25.1 R26.1 R27.1 R28.2 R32.1 R34.1 R35.1 R36.1 R37.2 R42.2 R43.1 R44.1 R45.2 R46.1 R47.2 R51.2 R54.1 R57.1 R65.2 U1.B5 U1.C1 U1.C7 U1.D2 U1.E1 U1.E5 U1.F3 U1.F6 U2.B5 U2.C1 U2.C7 U2.D2 U2.E1 U2.E5 U2.F3 U2.F6 U5.8 U6.8 U7.1 U7.3 U8.B11 U8.B13 U8.C8 U8.D13 U8.E3 U8.F5 U8.F7 U8.F8 U8.F13 U8.G7 U8.J4 U8.J13 U8.K8 U8.K10 U8.L14 U8.M6 U8.N5 U8.N6 U8.P12 U10.2 Y1.4(VCC) Y2.4(VCC)
P2V8: C7.1 C23.1 C24.2 C42.2 C63.1 D1.2 D2.2 D3.2 D4.2 FB1.1 FB2.1 J2.1(UV_UART_TXD) L1.2 R50.2 TP9.1(TP) U10.19(VCCB)
P5V0: C5.1 C53.2 C57.2 C60.2 C61.2 C62.2 C64.2 C94.2 C104.2 C105.2 C106.2 C107.2 C114.2 F1.2 J6.1 J6.2 J6.3(VBAT+#3) R2.2 R3.2 R10.1 R11.2 R21.2 R22.2 R40.1 R41.2 R59.1 U3.5 U3.6 U3.10 U3.21 U4.1 U4.2 U9.5 U9.6 U9.10 U9.21
P5V0_IN: C15.1 C16.1 F1.1 J3.1 J3.2 J3.3 J3.4 J3.5 J3.6 J3.19 J3.20 J3.21 J3.22 J3.23 J3.24 TP1.1(TP)
BT1120_CLK: J1.12 U8.E10
BT1120_D0: J1.4 U8.H10
BT1120_D1: J1.5 U8.J11
BT1120_D2: J1.6 U8.H11
BT1120_D3: J1.7 U8.H12
BT1120_D4: J1.8 U8.G11
BT1120_D5: J1.9 U8.G12
BT1120_D6: J1.10 U8.F16
BT1120_D7: J1.11 U8.F9
C13: TP5.1(TP) U8.C13
DONE: R42.1 TP7.1(TP) U8.B16
DPU_RX: J4.1 R4.2
DPU_TX: J4.2 R7.2
DVP_D0: J8.19 U8.H6
DVP_D1: J8.21 U8.L3
DVP_D2: J8.22 U8.L4
DVP_D3: J8.20 U8.J6
DVP_D4: J8.18 U8.H5
DVP_D5: J8.16 U8.H3
DVP_D6: J8.14 U8.H2
DVP_D7: J8.12 U8.H4
DVP_HSYNC: J8.9 U8.G3
DVP_MCLK: J8.13 R18.2
DVP_PCLK: J8.17 U8.J2
DVP_PWDN: J8.8 U8.G4
DVP_RST: J8.6 U8.F4
DVP_SCL: J8.5 R20.2 U8.F6
DVP_SDA: J8.3 R27.2 U8.E4
DVP_VSYNC: J8.7(VSYNC) U8.G6
EIO1: J4.7
EIO2: J4.8
EIO3: J4.17
EIO4: J4.9
EIO5: J4.24
EIO6: J4.23
EIO7: J4.18
H1_CKN: U2.B2 U8.T8
H1_CKP: U2.B3 U8.T7
H1_CS: R45.1 U2.A4 U8.R3
H1_D0: U2.D4 U8.P6
H1_D1: U2.D3 U8.R8
H1_D2: U2.C5 U8.P4
H1_D3: U2.D5 U8.R5
H1_D4: U2.D6 U8.P5
H1_D5: U2.E4 U8.R6
H1_D6: U2.E3 U8.P7
H1_D7: U2.E2 U8.R7
H1_D8: U2.F5 U8.L10
H1_D9: U2.F1 U8.R9
H1_D10: U2.F7 U8.L8
H1_D11: U2.F2 U8.P8
H1_D12: U2.G5 U8.M9
H1_D13: U2.G1 U8.P9
H1_D14: U2.G7 U8.L9
H1_D15: U2.G2 U8.N9
H1_RST: R44.2 U2.A5 U8.P3
H1_RWDS0: U2.C4 U8.R4
H1_RWDS1: U2.F4 U8.N8
H2_CKN: U1.B2 U8.T15
H2_CKP: U1.B3 U8.T14
H2_CS: R47.1 U1.A4 U8.R10
H2_D0: U1.D4 U8.N12
H2_D1: U1.D3 U8.P14
H2_D2: U1.C5 U8.P11
H2_D3: U1.D5 U8.R12
H2_D4: U1.D6 U8.N11
H2_D5: U1.E4 U8.R13
H2_D6: U1.E3 U8.N13
H2_D7: U1.E2 U8.R14
H2_D8: U1.F5 U8.M11
H2_D9: U1.F1 U8.N15
H2_D10: U1.F7 U8.N10
H2_D11: U1.F2 U8.R15
H2_D12: U1.G5 U8.M12
H2_D13: U1.G1 U8.P15
H2_D14: U1.G7 U8.M10
H2_D15: U1.G2 U8.N14
H2_RST: R46.2 U1.A5 U8.P10
H2_RWDS0: U1.C4 U8.R11
H2_RWDS1: U1.F4 U8.M13
I_RX: J7.6 R8.2 TP14.1(TP)
I_TX: J7.7 R6.2 TP15.1(TP)
IAM_ALIVE: J4.15 U8.J1
INIT_N: R43.2 TP8.1(TP) U8.D11
IO-0: J2.14 U8.T9
IO-1: J2.13 U8.T6
IO-2: J2.12 U8.T5
IO-3: J2.11 U8.T4
IO-4: J2.10 U8.T3
IO-5: J2.9 U8.T2
IO-6: J2.8 U8.R2
IO-7: J2.7 U8.R1
IO_LED_1: R67.1 U8.D5
IO_LED_2: R71.1 U8.D6
IO_LED_3: R69.1 U8.E6
IO_P5V0_SHDN: J4.10 U8.H1
IR_5V0: C4.2 C9.2 J7.1 J7.2 J7.3(VDD50#3) U4.5(VOUT)
IR_D0: J7.13 U8.R16
IR_D1: J7.14 U8.M14
IR_D2: J7.15 U8.P16
IR_D3: J7.16 U8.M15
IR_D4: J7.17 U8.N16
IR_D5: J7.18 U8.K11
IR_D6: J7.19 U8.K12
IR_D7: J7.20 U8.J12
IR_D8: J7.21 U8.H13
IR_D9: J7.22 U8.H14
IR_D10: J7.23 U8.G13
IR_D11: J7.24 U8.G14
IR_D12: J7.25 U8.F15
IR_D13: J7.26 U8.F10
IR_HSYNC: J7.28 U8.E15
IR_PCLK: J7.29 U8.E12
IR_PWR_EN: R5.2 U4.3 U8.H16
IR_UART_RX: R8.1 U8.T13
IR_UART_TX: R6.1 U8.T12
IR_VSYNC: J7.27 U8.E13
JTAG_EN: J5.6 R32.2 R33.2 U8.D10
LD_PWR_EN: J4.16 U8.E5
MCLK: R31.1 U8.C16
MCSN: R15.1 U5.1 U8.C15
MD0: U5.5 U8.C14
MD1: U5.2 U8.D16
MD2: R37.1 U5.3(W#/SIO2) U8.D15
MD3: R19.1 U5.7 U8.D12
MIPI1_CLK+: U8.D1
MIPI1_CLK-: U8.D2
MIPI1_D0+: U8.E1
MIPI1_D0-: U8.E2
MIPI1_D1+: U8.C1
MIPI1_D1-: U8.C2
MIPI2_CLK+: U8.A5
MIPI2_CLK-: U8.B5
MIPI2_D0+: U8.A4
MIPI2_D0-: U8.B4
MIPI2_D1+: U8.A6
MIPI2_D1-: U8.B6
P5033: J4.11 J4.12
PROGRAM_N: C95.2 J5.2 R65.1 SW1.2 U8.C12
SPI1_MISO: J4.20
SPI1_MOSI: J4.22
SPI1_NSS: J4.19
SPI1_SCK: J4.21
SPI2_MISO: J4.5
SPI2_MOSI: J4.3
SPI2_NSS: J4.6
SPI2_SCK: J4.4
SPI_CS: R25.2 U6.1 U8.L1
SPI_SCK: U6.6 U8.M1
SPI_SI: U6.5 U8.M2
SPI_SO: U6.2 U8.L2
SYNC-1: R9.1 R10.2 U3.11(SYNC)
SYNC-2: R39.1 R40.2 U9.11(SYNC)
SYNC_O: J1.13 U8.E9
SYS_CLK: R38.2 U8.D4
TCK: J5.3 R30.1 U8.F14
TDI: J5.5 R34.2 U8.F11
TDO: J5.1 R36.2 U8.E14
TEST_MODE1: U8.L11
TEST_MODE2: U8.L12
TMS: J5.4 R35.2 U8.E11
TP_K1: TP4.1(TP) U8.K1
TP_M16: TP10.1(TP) U8.M16
TP_P2: TP3.1(TP) U8.P2
TX_EN: R56.2 U8.K7 U10.10
UART_T: TP12.1(TP) U8.G10 U10.6
UART_T_LD: TP11.1(TP) U8.G9 U10.9
UPLD_RX: R4.1 U8.P1
UPLD_TX: R7.1 U8.N1
UV_PWR_EN: J6.7 R59.2 R60.1 U8.E16
UV_UART_RXD: J1.2 U8.T11
UV_UART_TXD: J1.1(UV_UART_TXD) U8.T10
VERSION_ID1: R57.2 R58.1 U8.J16
VERSION_ID2: R54.2 R55.1 U8.J15
N760129: C22.2 FB2.2 J8.4
N760503: C10.2 FB1.2 J8.23
N762812: R12.1 R13.1 Y1.1
N763219: R18.1 Y1.3
N849077: U8.M8
N900708: R23.1 R31.2 U5.6
N990170: R28.1 R29.1 Y2.1
N990230: R38.1 Y2.3
N1026841: R24.1 R26.2 U6.3(W\P\)
N1026851: R16.1 R17.2 U6.7
N1560231: R14.2 U4.6
N1593173: D2.1(CATHODE) R66.2
N1593177: D4.1(CATHODE) R70.2
N1593181: D3.1(CATHODE) R68.2
N1593233: Q3.3 R66.1
N1593237: Q2.3 R70.1
N1593241: Q1.3 R68.1
N1593321: Q3.1 R67.2
N1593325: Q2.1 R71.2
N1593329: Q1.1 R69.2
N1599549: L1.1 U3.9
N1609517: C6.2 R11.1 U3.18
N1613601: C42.1 R49.2 R50.1 U3.7
N1616720: L2.1 U3.22
N1616768: C41.1 R51.1 R52.2 U3.24
N1627713: R2.1 U3.2
N1630418: R3.1 U3.1
N2071731: L3.1 U9.9
N2071767: R22.1 U9.2
N2071821: C85.1 R61.2 R63.1 U9.7
N2072037: C29.2 R41.1 U9.18
N2072149: L4.1 U9.22
N2072181: R21.1 U9.1
N2072229: C84.1 R62.2 R64.1 U9.24
N2412822: D1.1(CATHODE) R48.2
N2602705: LD1.1 R53.2
N2602756: LD1.2 R1.2
N2606298: R53.1 U10.12
N2622599: TP2.1(TP) U10.15
N2690332: J8.1 TP13.1(TP)

Pads without a net: J7 8 9 10 11 31 32 34 35 37 38; LD1 3 4; U1 A1 A2 A3 A6 B1 B6 C3 C6 D7 E7 G4; U2 A1 A2 A3 A6 B1 B6 C3 C6 D7 E7 G4; U7 4; U8 A3 A7 A9 A11 A12 A14 A15 B1 B2 B3 B7 B9 B12 C11 F1 F2 G15 G16 H15 J5 K2 K3 K4 K5 K6 K13 K14 K15 K16 L5 L6 L7 L15 L16 M3 M4 M7 N2 N3 N4; U10 1 3 4 5 7 8 13 14 16 17 18 20

## Via types
v1: diameter 0.3, hole 0.15, TOP to BOTTOM, 256 vias
v2: diameter 0.4, hole 0.2, TOP to BOTTOM, 269 vias
v3: diameter 0.25, hole 0.15, TOP to BOTTOM, 69 vias

## Routing (per net, layer and track width the routed paths; a pad name or vN(x,y) marks a point on that pad's centre or on a via; arc(x,y) is an arc through that point)
GND: length 729.2
  TOP w0.102: 19.3,2.4 v2(19.33,2.42) ; 10.63,2.4 v2(10.6,2.43)
  TOP w0.18: U2.B7 U2.A7 v3(57.4,26.2) ; v3(55.15,22.25) 55.16,22.25 U2.G3 ; U2.C2 U2.D1 ; U1.B7 U1.A7 v3(50,26.2)
  TOP w0.2: v3(55.15,22.25) 55.16,22.25 55.16,21.91 55.26,21.81 56.99,21.81 57.09,21.91 57.09,22.31 U2.G6 ; v3(47.75,24.25) U1.C2 ; U1.E6 49.73,23.73 49.73,23.73 v3(49.75,23.75) ; R16.2 66.2,17.4 66.4,17.2 66.4,16.9 67.05,16.25 v2(70.38,16.25) ; C2.2 45.54,25 45.72,24.82 45.72,24.48 46.2,24 U1.D1 ; U2.D1 v3(53.97,24) 53.7,24 53,23.3 C3.2 ; C1.2 59.5,25.7 59,26.2 v1(58.1,26.2) v3(57.4,26.2) ; U1.B4 48.26,25.24 48.25,25.24 v3(48.25,25.25) ; U2.E6 v3(57.15,23.75) ; v3(55.65,25.25) 55.67,25.24 55.67,25.24 55.9,25 U2.B4 ; U1.G6 49.71,22.29 49.71,22 49.51,21.81 48,21.81 47.75,22.05 v3(47.75,22.25) 47.82,22.25 48,22.43 U1.G3 ; v3(50,26.2) v1(50.6,26.2)
  TOP w0.22: U6.4 62.6,13.1 62.4,12.9 62.4,12.7 62.5,12.6 63.2,12.6 63.3,12.5 R24.2 ; J5.7 v2(36.14,4.9)
  TOP w0.3: v2(57.7,4.68) 57.7,4.68 57.7,3.3 57.34,2.94 C32.1 ; U8.B10 v1(50.58,7.62) ; v1(61.6,20.5) 59.8,18.7 58.5,18.7 U8.T1 ; 59.4,6.4 59.4,7.3 59.7,7.6 61.4,7.6 61.74,7.94 v2(63.34,7.94) ; 59.4,6.4 U8.A1 ; 59.4,6.4 59.4,6.1 ; U8.A8 v1(53,6) ; U8.P13 v1(48.98,17.19) ; U8.E8 v1(52.2,9.2) ; U8.F12 v1(49.81,10.81) ; U8.F3 v1(56.99,10.79) ; v2(43.9,25) C2.2 ; U8.L13 v1(48.97,14.77) ; U8.A16 v1(46.55,6.05) ; U8.C10 v1(50.58,8.42) ; U8.H8 v1(53,11.6) ; U8.G2 v1(57.79,10.81) ; C5.2 38.3,19.4 37.9,19 37.08,19 36.68,18.6 C11.1 ; U8.E7 v1(53,9.2) ; v2(36.14,4.9) 36.14,4.27 36.15,4.26 ; U8.J9 v1(52.2,12.4) U8.H9 ; U8.D3 v1(56.95,8.45) ; U8.D14 v1(47.37,8.37) ; U8.C3 v1(57,7.6) ; U8.J8 v1(53,12.4) ; U8.N7 v1(53.8,15.6) ; U8.A13 v1(48.24,6.05) ; U8.G8 v1(52.2,10.8) ; U8.D8 v1(53,8.4) ; U8.J7 v1(53.8,12.4) ; U8.M5 v1(55.41,15.61) ; U8.T16 v1(44.5,18.4) ; R14.1 31.7,17.9 31.2,18.4 C9.1 v1(29.4,17.4) ; U8.C6 v1(54.55,7.64) ; C26.1 29.5,7.5 28.9,8.1 v2(28.9,8.7) ; R30.2 v1(39.6,10.68) 39.6,10.9 40,11.3 42.39,11.3 R23.2 ; R33.1 v1(35.1,10.7) ; U8.J3 v1(56.21,13.19) ; U8.A10 v1(50.61,6.79) ; R5.1 v2(40.1,22) ; U8.J14 v1(47.4,13.2) ; U8.G1 v1(58.59,10.81) ; U8.G5 v1(54.6,10.8) ; U8.B14 v1(48.16,6.84) ; U8.C9 v1(52.2,7.6) ; U8.B8 v1(53,6.8)
  TOP w0.4: J2.4 70.7,25.4 70.1,26 v2(69.9,26) v2(68.4,26) v2(67.4,26) v2(66.4,26) v2(65.4,26) v2(64.4,26) v2(63.5,26) ; C22.1 70.68,9.39 70.38,9.7 v2(70.38,9.75) ; v2(61.7,23.9) v2(61.7,24.7) 61.7,25 61.9,25.2 v2(61.9,25.47) J2.15 ; 59.4,6.1 60,5.5 v2(60.9,5.5) v2(62.2,5.5) 62.22,5.52 62.78,5.52 63.5,4.8 v2(63.8,4.8) v2(64.7,4.8) ; v2(74.2,15.4) C17.2 v2(75,14.3) ; v2(74.2,15.4) v2(73.4,15.4) v2(72.7,15.4) ; v2(74.2,15.4) v2(75,15.4) v2(75.8,15.4) ; C14.1 v2(78.7,16.7) C13.2 ; J5.10 v2(35.1,4.26) J5.9 ; C11.1 v2(36.68,17.22) ; J1.14 v2(29.2,25.23) ; v2(68.6,7.6) C27.2 v2(69.33,6.8) C28.1 v2(70.1,7.6) ; C12.2 v2(40.97,17.23) ; R1.1 v2(76,26.2) ; v2(41.1,26.75) 41.05,26.7 J1.16 v2(39.57,26.7) v2(29.23,26.7) J1.15 ; U4.4 v2(33,21.69) ; R24.2 63.3,10.9 63.5,10.7 R29.2 63.5,9 63.6,8.9 v2(64.4,8.9) Y2.2 v2(63.34,7.94) ; C4.1 v2(26.7,21.7) ; 19.3,2.4 v2(18.1,2.4) v2(17.2,2.4) v2(16.3,2.4) v2(15.2,2.4) v2(14.1,2.4) v2(13.1,2.4) v2(12.2,2.4) v2(11.4,2.4) 10.63,2.4 ; U5.4 v2(34.68,12.05) ; J2.5 v2(69.9,25.23) ; R9.2 v2(15.2,18.05) ; J1.3 v2(38,25.23) ; R12.2 v2(77.91,19.8) 77.5,19.8 77.4,19.7 v2(77,19.7) v2(76.2,19.7) v2(75.3,19.7) v2(74.6,19.7) v2(73.8,19.7) Y1.2 72.76,18.54 v2(72.6,18.7) v2(72.6,17.9) C10.1 ; U7.2 v2(78.17,13.05) ; J2.6 v2(69.1,25.23)
  TOP w0.5: C18.2 v2(72.33,11.8) C19.2 v2(73.83,11.8) C20.2 v2(74.6,11.1) C23.2 75.3,10.39 75.3,10.4 v2(75.33,10.4) 76.08,10.4 C24.1 v2(77.19,10.41) 78.08,10.41 C21.1 v2(78.2,9.6) 78,9.4 C25.2 ; v2(75,26.2) 74.5,26.7 J2.16
  TOP w0.6: R39.2 v2(15.2,2.4)
  GND-2 w0.16: 60.6,20.6 60.6,17.9 58.31,15.61 ; 58.31,15.61 57.7,15.61 57.7,14.3 56.59,13.19 v1(56.21,13.19) 56.21,12.41 55.6,11.8 54.4,11.8 ; 58.31,15.61 59,14.92 59,11.22 v1(58.59,10.81) 58.59,10.81 v1(57.79,10.81) 57.01,10.81 v1(56.99,10.79) 56.61,10.41 55.49,10.41 55.1,10.8 v1(54.6,10.8) 54.6,11.6 54.4,11.8 ; 48.6,19.91 48.58,19.89 48.58,17.52 48.91,17.19 v1(48.98,17.19) 49.4,17.6 49.4,19.6 49.09,19.91 48.6,19.91 ; 48.6,19.91 47.75,20.75 ; 54.4,11.8 v1(53.8,12.4) v1(53,12.4) ; v1(52.2,12.4) v1(53,12.4) ; v1(53,12.4) v1(53,11.6)
  GND-2 w0.18: v1(49.81,10.81) 50.4,11.4 50.8,11.4 51.4,10.8 v1(52.2,10.8) v1(53,11.6)
  GND-2 w0.2: 44.5,14.7 v1(44.5,18.4) 44.5,19.7 45.2,20.4 47.4,20.4 47.75,20.75 v3(47.75,22.25) ; 44.5,14.7 44.5,10 45.2,9.3 47.1,9.3 47.37,9.03 v1(47.37,8.37) ; 44.5,14.7 45.1,14.1 46.6,14.1 ; v1(50.61,6.79) 50.61,6.79 51.82,6.79 ; v1(50.61,6.79) 50.58,6.82 v1(50.58,7.62) v1(50.58,8.42) ; v1(50.61,6.79) 50.61,6.31 50.34,6.05 v1(48.24,6.05) ; v1(54.5,26.2) 54.7,26.2 v3(55.65,25.25) ; v1(47,26.2) 47.5,26.2 48.25,25.45 v3(48.25,25.25) 48.25,24.45 48.05,24.25 v3(47.75,24.25) ; 46.6,14.1 47.8,15.3 48.5,15.3 48.97,14.83 v1(48.97,14.77) 48.3,14.1 46.6,14.1 ; v1(53.8,15.6) 53.8,15.1 54.1,14.8 55.1,14.8 55.4,15.1 55.4,15.6 v1(55.41,15.61) 57.7,15.61 ; v1(50.6,26.2) 51.7,25.1 51.7,24 ; 54.3,6.8 56.6,6.8 57,7.2 v1(57,7.6) 57,8.4 v1(56.95,8.45) ; 54.3,6.8 54.55,7.05 v1(54.55,7.64) ; 54.3,6.8 v1(53,6.8) 52.99,6.79 52.1,6.79 ; v1(61.6,20.5) 60.7,20.5 60.5,20.7 60.5,21.6 ; 51.7,24 v3(53.97,24) 54.05,24 ; 51.7,24 51.45,23.75 v3(49.75,23.75) ; v1(48.24,6.05) 48.16,6.14 v1(48.16,6.84) ; v1(48.24,6.05) v1(46.55,6.05) ; 60.5,21.6 60.5,22.8 59.8,23.5 57.41,23.5 v3(57.15,23.75) ; 60.5,21.6 55.4,21.6 55.15,21.85 v3(55.15,22.25) ; v1(52.2,9.2) v1(53,9.2) v1(53,8.4) v1(52.2,7.6) 51.82,7.22 51.82,6.79 ; 51.82,6.79 52.1,6.79 52.1,6.79 ; 52.1,6.79 52.1,6.2 52.3,6 v1(53,6)
  GND-2 w0.3: v1(29.4,17.4) 29.4,18.8 30.6,20 31.2,20 v2(31.4,19.8)
  GND-5 w0.102: 5.52,4.02 TP6.1 ; TP6.1 6.4,3.72 ; TP6.1 6.4,6.08 ; TP6.1 7.28,4.02 ; TP6.1 5.52,5.78 ; TP6.1 5.22,4.9 ; TP6.1 7.28,5.78 ; TP6.1 7.58,4.9
  GND-5 w0.16: 47.75,20.75 48.6,19.91 ; 48.6,19.91 49.09,19.91 49.4,19.6 49.4,17.6 v1(48.98,17.19) 48.91,17.19 48.58,17.52 48.58,19.89 48.6,19.91 ; 60.6,20.6 60.6,17.9 58.31,15.61 ; v1(52.2,12.4) v1(53,12.4) ; v1(53,12.4) v1(53.8,12.4) 54.4,11.8 ; v1(53,12.4) v1(53,11.6) v1(52.2,10.8) 51.4,10.8 50.8,11.4 50.4,11.4 v1(49.81,10.81) ; 54.4,11.8 54.6,11.6 v1(54.6,10.8) 55.1,10.8 55.49,10.41 56.61,10.41 v1(56.99,10.79) 57.01,10.81 v1(57.79,10.81) 58.59,10.81 v1(58.59,10.81) 59,11.22 59,14.92 58.31,15.61 ; 54.4,11.8 55.6,11.8 56.21,12.41 v1(56.21,13.19) 56.59,13.19 57.7,14.3 57.7,15.61 58.31,15.61
  GND-5 w0.2: v1(54.5,26.2) 54.7,26.2 v3(55.65,25.25) ; v1(54.55,7.64) 54.55,7.05 54.3,6.8 ; v1(48.24,6.05) 48.16,6.14 v1(48.16,6.84) ; v1(48.24,6.05) v1(46.55,6.05) ; v1(48.24,6.05) 50.34,6.05 50.61,6.31 v1(50.61,6.79) ; v1(50.58,8.42) v1(50.58,7.62) 50.58,6.82 v1(50.61,6.79) ; 52.1,6.79 52.1,6.79 51.82,6.79 ; 52.1,6.79 52.1,6.2 52.3,6 v1(53,6) ; 52.1,6.79 52.99,6.79 v1(53,6.8) 54.3,6.8 ; 54.3,6.8 56.6,6.8 57,7.2 v1(57,7.6) 57,8.4 v1(56.95,8.45) ; 51.7,24 v3(53.97,24) 54.05,24 ; 51.7,24 51.45,23.75 v3(49.75,23.75) ; 51.7,24 51.7,25.1 v1(50.6,26.2) ; v3(48.25,25.25) 47.3,26.2 v1(47,26.2) ; 60.5,21.6 55.4,21.6 55.15,21.85 v3(55.15,22.25) ; 60.5,21.6 60.5,22.8 59.8,23.5 57.41,23.5 v3(57.15,23.75) ; 60.5,21.6 60.5,20.7 60.7,20.5 v1(61.6,20.5) ; v1(47.37,8.37) 47.37,9.03 47.1,9.3 45.2,9.3 44.5,10 44.5,14.7 ; v1(53.8,15.6) 53.8,15.1 54.1,14.8 55.1,14.8 55.4,15.1 55.4,15.6 v1(55.41,15.61) 57.7,15.61 ; v1(52.2,9.2) v1(53,9.2) v1(53,8.4) v1(52.2,7.6) 51.82,7.22 51.82,6.79 ; 46.6,14.1 47.9,15.4 48.4,15.4 48.97,14.83 v1(48.97,14.77) 48.3,14.1 46.6,14.1 ; 46.6,14.1 45.1,14.1 44.5,14.7 ; v3(47.75,22.25) 47.75,20.75 47.4,20.4 45.2,20.4 44.5,19.7 v1(44.5,18.4) 44.5,14.7 ; v1(50.61,6.79) 50.61,6.79 51.82,6.79 ; v3(47.75,24.25) 44.65,24.25 v2(43.9,25)
  GND-5 w0.3: v1(29.4,17.4) 29.4,18.8 30.6,20 31.2,20 v2(31.4,19.8)
  SIG-6 w0.127: v2(63.34,7.94) 62.9,7.5 60.2,7.5 59.8,7.1 58.8,7.1 57.45,8.45 v1(56.95,8.45)
  SIG-6 w0.22: v1(57,7.6) 58.6,6 60.4,6 v2(60.9,5.5)
  GND-7 w0.102: TP6.1 7.28,5.78 ; TP6.1 5.22,4.9 ; TP6.1 6.4,3.72 ; TP6.1 7.58,4.9 ; TP6.1 5.52,4.02 ; TP6.1 5.52,5.78 ; TP6.1 6.4,6.08 ; TP6.1 7.28,4.02
  GND-7 w0.16: 54.4,11.8 v1(53.8,12.4) v1(53,12.4) ; 54.4,11.8 55.6,11.8 56.21,12.41 v1(56.21,13.19) 56.59,13.19 57.7,14.3 57.7,15.61 58.31,15.61 ; 54.4,11.8 54.6,11.6 v1(54.6,10.8) 55.1,10.8 55.49,10.41 56.61,10.41 v1(56.99,10.79) 57.01,10.81 v1(57.79,10.81) 58.59,10.81 v1(58.59,10.81) 59,11.22 59,14.92 58.31,15.61 ; v1(52.2,12.4) v1(53,12.4) ; v1(53,12.4) v1(53,11.6) v1(52.2,10.8) 51.4,10.8 50.8,11.4 50.4,11.4 v1(49.81,10.81) ; 48.6,19.91 47.75,20.75 ; 48.6,19.91 48.58,19.89 48.58,17.52 48.91,17.19 v1(48.98,17.19) 49.4,17.6 49.4,19.6 49.09,19.91 48.6,19.91 ; 58.31,15.61 60.6,17.9 60.6,20.6
  GND-7 w0.2: v1(56.95,8.45) 57,8.4 v1(57,7.6) 57,7.2 56.6,6.8 54.3,6.8 ; v1(61.6,20.5) 60.7,20.5 60.5,20.7 60.5,21.6 ; v1(48.16,6.84) 48.16,6.14 v1(48.24,6.05) ; 51.7,24 51.45,23.75 v3(49.75,23.75) ; 51.7,24 51.7,25.1 v1(50.6,26.2) ; 51.7,24 v3(53.97,24) 54.05,24 ; 52.1,6.79 52.99,6.79 v1(53,6.8) 54.3,6.8 ; 52.1,6.79 52.1,6.79 51.82,6.79 ; 52.1,6.79 52.1,6.2 52.3,6 v1(53,6) ; v1(50.58,8.42) v1(50.58,7.62) 50.58,6.82 v1(50.61,6.79) ; v3(47.75,22.25) 47.75,20.75 47.4,20.4 45.2,20.4 44.5,19.7 v1(44.5,18.4) 44.5,14.7 ; 44.5,14.7 44.5,10 45.2,9.3 47.1,9.3 47.37,9.03 v1(47.37,8.37) ; 44.5,14.7 45.1,14.1 46.6,14.1 ; 60.5,21.6 55.4,21.6 55.15,21.85 v3(55.15,22.25) ; 60.5,21.6 60.5,22.8 59.8,23.5 57.41,23.5 v3(57.15,23.75) ; 51.82,6.79 50.61,6.79 v1(50.61,6.79) ; 51.82,6.79 51.82,7.22 v1(52.2,7.6) v1(53,8.4) v1(53,9.2) v1(52.2,9.2) ; 46.6,14.1 47.9,15.4 48.4,15.4 48.97,14.83 v1(48.97,14.77) 48.3,14.1 46.6,14.1 ; v1(50.61,6.79) 50.61,6.31 50.34,6.05 v1(48.24,6.05) ; v1(53.8,15.6) 53.8,15.1 54.1,14.8 55.1,14.8 55.4,15.1 55.4,15.6 v1(55.41,15.61) 57.7,15.61 ; v3(55.65,25.25) 54.7,26.2 v1(54.5,26.2) ; 54.3,6.8 54.55,7.05 v1(54.55,7.64) ; v2(43.9,25) 44.65,24.25 v3(47.75,24.25) ; v3(48.25,25.25) 47.3,26.2 v1(47,26.2) ; v1(48.24,6.05) v1(46.55,6.05)
  GND-7 w0.3: v1(29.4,17.4) 29.4,18.8 30.6,20 31.2,20 v2(31.4,19.8)
  BOTTOM w0.102: 61.2,8.28 C98.2 61.2,7.12 ; Q2.2 66.03,5.11 ; Q2.2 66.85,4.68 ; Q2.2 65.22,4.68 ; 19.3,17.95 v2(19.33,17.98)
  BOTTOM w0.15: C96.2 55.17,8.26 v1(54.55,7.64) ; 48.91,17.19 48.58,17.52 48.58,18.48 48.7,18.6 C66.1 49.4,18.4 49.4,17.6 v1(48.98,17.19) 48.91,17.19
  BOTTOM w0.16: v1(48.97,14.77) 49.33,14.4 50.25,14.4 50.35,14.3 C76.1
  BOTTOM w0.2: C55.1 48.8,22 48.6,21.8 C59.1 47.72,21.8 47.62,21.9 47.62,22.12 v3(47.75,22.25) ; C37.1 49.83,26.03 v3(50,26.2) ; C78.1 57.1,13.7 58,14.6 C68.1 ; C78.1 C73.1 ; C78.1 56.1,13.3 v1(56.21,13.19) ; C108.2 C113.2 58.44,4.84 58.28,4.68 v2(57.7,4.68) ; 50.14,23.7 49.8,23.7 v3(49.75,23.75) ; 50.14,23.7 C44.2 ; 50.14,23.7 50.29,23.55 C48.1 ; C97.2 50.68,7.72 v1(50.58,7.62) ; v1(48.16,6.84) 48.2,6.89 C99.1 ; C67.1 53.6,16.2 53.8,16 53.8,15.6 v1(53.8,15.6) 53.9,15.5 C70.1 C72.1 53.9,14.1 C77.1 ; C39.1 54.08,24 v3(53.97,24) C50.1 C51.1 ; C81.2 v1(49.81,10.81) 49.99,10.64 49.99,10.39 C89.1 ; v3(57.15,23.75) 57.16,23.76 C45.1 58.21,23.76 58.27,23.7 C43.2 ; C109.1 50.3,5.9 50.61,6.21 v1(50.61,6.79) ; C111.2 47.66,5.86 47.84,6.05 v1(48.24,6.05) 48.55,6.05 48.7,5.9 C110.1 ; C35.1 C58.1 55.21,21.8 55.14,21.87 55.14,22.24 v3(55.15,22.25) ; C75.1 C76.1 50.9,14.5 50.2,15.2 49.4,15.2 v1(48.97,14.77) 48.43,15.3 47.9,15.3 47.46,14.86 C74.2 47.46,13.71 C79.1 47.45,13.24 v1(47.4,13.2) ; C82.2 54.6,11.23 v1(54.6,10.8) 54.81,10.6 C88.1 C87.1 ; C46.1 50.42,26.02 v1(50.6,26.2) 52.1,26.2 C34.2 ; C101.1 56.7,6.7 57,7 v1(57,7.6) 57.4,8 58.4,8 C93.1 ; v1(46.55,6.05) 46.55,5.45 46.4,5.3 C112.2 ; C90.1 57,10.77 v1(56.99,10.79) ; v1(55.41,15.61) 55.5,15.7 C69.1 ; C92.1 57.01,8.5 v1(56.95,8.45) ; v1(53,9.2) C91.1 v1(52.2,9.2) ; v3(57.4,26.2) 57.4,25.9 57.11,25.61 C54.1 ; C83.1 52.3,10.9 v1(52.2,10.8) 52,11 51.8,11 C86.1 ; C49.2 45.6,24.3 45.9,24 C52.1 46.2,24.5 46.3,24.6 C40.1 ; C100.1 52.5,6.7 52.9,6.7 v1(53,6.8) 53.4,6.8 53.5,6.7 C103.1 ; C66.1 49.6,18.9 49.3,19.2 C65.1 ; C36.1 v1(54.5,26.2) ; C47.1 v3(55.65,25.25) ; C102.1 54.7,6.7 54.55,6.84 v1(54.55,7.64) ; C38.1 v1(47,26.2)
  BOTTOM w0.25: J8.15 66.95,16.25 66.6,15.9 C71.1 ; v2(78.7,16.7) 78.7,17.7 78.9,17.9 R56.1 81,17.9 81.15,18.05 U10.11 83.55,18.05 U10.EPAD
  BOTTOM w0.3: v2(40.97,17.23) 41.04,17.3 41.5,17.3 41.7,17.5 R55.2 ; J7.5 v2(26.7,19.5) ; J7.33 v2(28.36,11.1) ; C95.1 v1(39.6,10.68) ; J8.15 v2(70.38,16.25) ; J7.4 v2(31.4,19.8) ; J7.36 v2(29.7,10.2) ; R58.2 36.7,17.2 v2(36.68,17.22) ; J7.30 29.4,12 v2(29.1,11.7) ; J7.39 v2(28.36,9.3) ; C115.1 v1(53,6) ; v2(69.7,21.4) 68.5,21.4 68.3,21.2 68.3,20.9 68.45,20.75 J8.24 ; J7.12 v1(29.4,17.4) ; J8.2 v2(70.38,9.75)
  BOTTOM w0.4: 15.3,12.9 J6.4 ; 15.3,12.9 15.5,12.7 16.1,12.7 ; 15.3,12.9 15.3,12.3 14.6,11.6 ; v2(87.1,23.2) 86.4,22.5 C63.2 ; v2(63.34,7.94) 63.1,7.7 C98.2 ; J8.26 v2(74.8,6.75) ; v2(66.03,4.1) Q2.2 65.92,4.8 v2(64.7,4.8) ; R48.1 13.82,26.68 v2(13.82,26.58) 13.4,26.16 R49.1 v2(14.03,25.6) ; 16.1,12.7 16.7,12.7 16.9,12.9 J6.6 ; 16.1,12.7 J6.5 ; v2(20.55,10.6) R62.1 v2(21.4,11.65) ; J7.40 v2(26.7,21.7) ; v2(28.9,8.7) 28.5,8.3 J7.41 ; Q1.2 v2(75.93,4.1) ; C94.1 17.2,8.7 17.4,8.9 v2(17.4,9.65) ; C56.2 51.9,22.3 51.5,22.7 C44.2 ; 19.3,17.95 J6.10 19.3,15.3 18.5,14.5 J6.8 ; J6.9 10.9,16.3 10.1,17.1 v2(10.1,18.05) ; C53.1 17.2,23.7 17.42,23.92 v2(17.42,24.53) ; 14.6,11.6 14.6,10.9 v2(14.3,10.6) R61.1 13.4,11.18 v2(13.82,11.6) 14.6,11.6 ; C49.2 C33.2 44.3,25.7 43.9,25.3 v2(43.9,25) ; C114.1 13.3,5.6 13.4,5.7 C107.1 ; v2(69.9,25.23) 69.9,23.8 70.45,23.25 J8.25 ; C80.1 86.5,12.9 v2(86.5,8.65) ; R60.2 v2(22,13.3) ; C62.1 13.4,20.7 13.3,20.6 C64.1 ; v2(21.4,26.65) R52.1 v2(20.55,25.6) ; SW1.1 v2(28.38,4.4) ; Q3.2 v2(57.7,4.68)
  vias: v2(3,13.8) v2(3,12.5) v2(3,11.2) v2(3,9.9) v2(3,8.7) v2(4,13.8) v2(4,12.5) v2(4,11.2) v2(4,9.9) v2(4,8.7) v2(5.2,13.8) v2(5.2,12.5) v2(5.2,11.2) v2(5.2,9.9) v2(5.2,8.7) v2(6.4,13.8) v2(6.4,12.5) v2(6.4,11.2) v2(6.4,9.9) v2(6.4,8.7) v2(7.4,13.8) v2(7.4,12.5) v2(7.4,11.2) v2(7.4,9.9) v2(7.4,8.7) v2(9.08,3.8) v2(9.08,3.05) v2(9.08,2.43) v2(9.33,19.67) v2(9.32,18.95) v2(9.35,18.1) v2(9.8,3.07) v2(9.8,2.43) v2(10.85,18.07) v2(15.46,21.5) v2(15.48,6.53) v2(17.41,22.26) v2(17.5,7.25) v2(18.44,22.45) v2(18.6,7.4) v2(19.33,3.05) v2(19.95,17.98) v2(20.2,3.05) v2(20.2,2.43) v2(20.35,18.65) v2(20.65,17.98) v2(21.1,3.05) v2(21.1,2.43) v2(21.3,17.98) v2(21.95,17.98) v2(22,3.07) v2(22,2.43) v2(85.8,8.65) v2(85.8,7.45) v2(86.5,7.45) v2(87.2,8.65) v2(87.2,7.45)
P1V0: length 90.9
  TOP w0.3: U8.H7 v1(53.8,11.6) ; U8.C5 v1(55.35,7.64) ; U8.C7 v1(53.76,7.64) ; U8.K9 v1(52.2,13.2) ; U8.B15 v1(47.39,6.81) ; U8.A2 v1(57.8,6) 57.8,5.7 57.6,5.5 56.6,5.5 56.4,5.3 C32.2 ; U8.D7 v1(53.8,9.2) ; U8.J10 v1(51.4,12.4) ; U8.D9 v1(52.2,8.4) ; U8.C4 v1(56.16,7.64)
  VCC-4 w0.16: v1(53.8,11.6) U8.H7 53.4,12.6 53.2,12.8 52.6,12.8 ; v1(53.8,11.6) 53.4,11.2 ; v1(53.8,11.6) 54.2,11.2 54.2,9.6 v1(53.8,9.2) ; 53.4,11.2 53.4,9.6 v1(53.8,9.2) ; 53.4,11.2 52.71,11.2 52.6,11.31 52.6,12 ; v1(53.8,9.2) U8.D7 52.6,8.8 v1(52.2,8.4) 52.6,8 U8.C7 v1(53.76,7.64) 54.2,8.09 54.2,8.8 ; v1(53.8,9.2) 54.2,8.8 ; 52.6,12 51.8,12 v1(51.4,12.4) v1(52.2,13.2) 52.6,12.8 ; 52.6,12 52.6,12.8 ; 54.2,8.8 55.1,8.8 55.3,8.6 55.3,7.7
  VCC-4 w0.18: v1(55.35,7.64) 55.3,7.7 ; U8.H7 52.6,12
  VCC-4 w0.3: 55.2,6.7 53.6,5.1 52.4,5.1 52.2,5.3 49.6,5.3 48.9,4.6 42.9,4.6 ; 55.2,6.7 54,6.7 53.7,7 53.76,7.05 v1(53.76,7.64) ; 55.2,6.7 55.35,6.86 v1(55.35,7.64) ; 55.2,6.7 56.16,6.7 ; v1(56.16,7.64) 56.16,6.7 ; 56.16,6.7 56.85,6 v1(57.8,6)
  VCC-4 w0.4: v2(24.75,5.35) v2(24.75,6.1) v2(24.75,6.8) ; v2(24.75,6.8) v2(24.75,7.5) v2(24.75,8.2) ; v2(24.75,6.8) 28.4,6.8 32,3.2 41.5,3.2 45.1,6.8 47.37,6.8 v1(47.39,6.81)
  BOTTOM w0.15: v1(53.8,9.2) 54.2,8.8 C96.1
  BOTTOM w0.2: C112.1 45.8,6.3 46.1,6.6 46.8,6.6 47,6.4 C111.1 47.4,6.8 v1(47.39,6.81) ; C113.1 57.9,5.9 v1(57.8,6) 57.9,6.1 C108.1 57.9,6.9 58.2,7.2 59.7,7.2 C98.1 ; v1(56.16,7.64) 56.1,7.59 C101.2 ; v1(55.35,7.64) 55.3,7.59 C102.2 ; v1(53.8,11.6) 54.2,11.6 C82.1 ; v1(52.2,13.2) 51.64,13.76 C75.2 ; C81.1 v1(51.4,12.4) ; C97.1 v1(52.2,8.4) ; v1(53.76,7.64) 53.8,7.6 C103.2
P1V2: length 2.2
  VCC-4 w0.4: v2(10.05,8.27) v2(10.05,7.55) v2(10.05,6.8) v2(10.05,6.1)
P1V5: length 8.1
  TOP w0.4: v2(70.75,13.45) 71.4,12.8 C18.1 C19.1 C20.1 75.4,12.8 76.1,12.1 U7.5
  BOTTOM w0.3: v2(70.75,13.45) 70.45,13.75 J8.10
P1V8: length 427.7
  TOP w0.15: U1.C1 U1.D2 v3(47.26,23.76) U1.E1
  TOP w0.16: U2.E5 U2.F6
  TOP w0.18: v3(46.56,25.24) 46.56,24.64 46.7,24.5 U1.C1 ; v3(55.15,22.75) U2.F3
  TOP w0.2: U2.C1 54.1,24.5 53.96,24.64 ; v3(53.88,23.35) 54.03,23.5 U2.E1 ; C3.1 52.6,24.3 52.94,24.64 53.96,24.64 ; v3(57.15,22.75) U2.F6 ; U2.C7 57.66,24.5 v3(57.86,24.7) 58.37,24.7 58.67,24.4 C1.1 ; 53.96,24.64 v3(53.96,25.24) ; U2.B5 v3(56.15,25.25) ; U1.C7 50.12,24.5 v3(50.32,24.3) ; C2.1 45.4,24 45.9,23.5 v1(46.6,23.5) 46.61,23.49 46.96,23.49 46.97,23.48 46.98,23.48 U1.E1 ; v3(47.75,22.75) U1.F3 ; U8.C8 v1(53,7.6) ; U2.D2 54.9,24 55.14,24.24 v3(55.15,24.25) ; U1.E5 v3(49.32,23.18) U1.F6 ; v3(48.75,25.25) U1.B5
  TOP w0.26: R32.1 32.78,10.1 32.68,10 32.68,9.24 32.52,9.08 R37.2
  TOP w0.28: J5.8 35.64,5.94 v2(35.3,5.6)
  TOP w0.3: R36.1 v1(41.1,10.68) ; U8.J4 v1(55.39,13.21) ; U8.J13 v1(48.16,13.23) ; U8.B11 v1(49.84,6.84) ; R35.1 v1(38.1,10.68) ; v2(59.33,9.2) 59.33,8.77 59.7,8.4 61,8.4 61.5,8.9 61.5,10.5 61.2,10.8 R26.1 ; 69.2,13.7 68.9,14 67.4,14 66.8,14.6 U6.8 65.6,14.7 R17.1 ; U8.G7 v1(53,10.8) ; v1(33.7,10.68) R32.1 ; U8.B13 v1(48.95,6.84) ; U5.8 41.73,15.86 42.3,16.43 R19.2 ; U8.N6 v1(54.6,16.4) ; U8.K8 v1(53,13.2) ; U8.F5 v1(54.61,10.01) ; U8.L14 v1(48.19,14.79) ; U8.M6 v1(54.58,15.58) ; U8.P12 v1(49.78,17.18) ; U8.E3 v1(56.99,9.21) ; R34.1 v1(36.6,10.68) ; U8.D13 v1(48.21,8.41) ; U8.F7 v1(53,10) ; U8.N5 v1(55.41,16.41) ; U8.K10 v1(51.4,13.2) ; U8.F8 v1(52.2,10) ; J5.8 35.64,7.2 35.34,7.5 C26.2 ; U8.F13 v1(48.99,10.79)
  TOP w0.4: R43.1 v2(52.1,2.95) ; C17.1 73.15,14.25 v2(72.2,14.25) v2(71.4,14.25) 69.75,14.25 69.2,13.7 R20.1 ; R15.2 v2(34.79,17.22) ; R25.1 66.1,11.7 66.9,10.9 R28.2 67.4,9.8 v2(67.8,9.4) R27.1 ; C14.2 v2(78.7,15.7) C13.1 77,15.7 76.16,16.54 Y1.4 ; R13.2 v2(80.4,19.1) ; J2.2 72.3,25.7 v2(71.9,26.1) ; J2.3 v2(71.5,25.23) ; C28.2 C27.1 v2(67.6,5.8) 67.46,5.94 Y2.4 ; C11.2 v2(39.03,18.02) C12.1 39.97,16.26 40.37,15.86 U5.8 ; U7.3 v2(80.3,14) 80.6,13.7 80.6,12.6 80.1,12.1 U7.1 79.1,11.3 79.2,11.2 C21.2 79.2,9.7 79.4,9.5 C25.1 ; v2(44.6,2.96) R42.2
  VCC-4 w0.16: 51.8,10.4 v1(52.2,10) v1(53,10) v1(53,10.8) ; 51.8,10.4 51.8,10.4 49.8,10.4 ; 51.8,10.4 51,11.2 49.4,11.2 v1(48.99,10.79) ; 48.5,9.6 48.6,9.7 U8.F13 v1(48.99,10.79) ; 48.5,9.6 49.6,9.6 49.7,9.7 49.7,10.3 49.8,10.4 ; 48.5,9.6 48.2,9.3 48.2,8.9 ; 55.29,10.01 55.29,11.49 56,12.2 56,12.6 v1(55.39,13.21) ; 55.29,10.01 55.68,9.62 56.58,9.62 v1(56.99,9.21) ; 55.29,10.01 v1(54.61,10.01) ; 49.8,10.4 49.42,10.4 49.02,10.79 v1(48.99,10.79)
  VCC-4 w0.18: 58.4,19.9 61.8,23.3 70.3,23.3 71.5,24.5 v2(71.5,25.23) 71.5,25.6 71.9,26 v2(71.9,26.1) ; 58.4,19.9 53.8,19.9 ; 58.4,19.9 60,18.3 60,16.41 ; 53.8,19.9 49.8,19.9 50.2,19.5 50.2,17.6 v1(49.78,17.18) 49.4,17.57 49.4,19.8 49.3,19.9 ; 53.8,19.9 54.7,20.8 56.2,20.8 57.2,21.8 57.2,22.7 v3(57.15,22.75) ; 55.15,24.25 54.35,24.25 53.9,24.7 53.96,24.76 v3(53.96,25.24) ; 55.6,24.25 55.6,24.5 56.15,25.05 v3(56.15,25.25) ; v1(48.21,8.41) 48.21,7.59 v1(48.95,6.84) v1(49.84,6.84) 49.84,6.38 50.02,6.2 51.6,6.2 v1(53,7.6) ; v1(46.6,23.5) 47,23.5 47.26,23.24 ; 48.6,19.9 48.5,20 48.5,22 47.75,22.75 v3(47.75,22.75) 47.75,22.75 47.26,23.24 ; 47.26,23.24 v3(47.26,23.76)
  VCC-4 w0.2: 53.9,24.7 53.6,24.7 53.2,24.3 ; 55.15,23.25 55.15,23.25 55.6,23.7 55.6,24.25 v3(55.15,24.25) ; 55.15,23.25 54.6,23.8 54.6,24.25 ; 55.15,23.25 v3(55.15,22.75) ; 49.8,19.9 43.7,19.9 ; v3(56.15,25.25) 57.55,25.25 57.86,24.94 v3(57.86,24.7) ; v3(53.88,23.35) 53.45,23.35 53.2,23.6 53.2,24.3 ; 53.2,24.3 v3(50.32,24.3) ; v3(50.32,24.3) 50.32,23.52 ; v3(50.32,24.3) 50.32,24.98 50.05,25.25 v3(48.75,25.25) ; 50.32,23.52 49.98,23.18 v3(49.32,23.18) ; 50.32,23.52 50.68,23.52 51.1,23.1 51.1,20 51,19.9 ; 45.15,23.95 45.6,23.5 v1(46.6,23.5) 46.6,23.65 46.7,23.76 v3(47.26,23.76) ; 45.15,23.95 43.7,22.5 ; 45.15,23.95 45.15,24.95 45.44,25.24 v3(46.56,25.24) ; v1(51.4,13.2) 51.4,14 52.3,14.9 54.58,14.9
  VCC-4 w0.3: 76.4,16 76.1,16.3 74,16.3 73.8,16.5 73.16,16.5 73.06,16.4 72.55,16.4 71.69,15.54 71.69,14.85 71.99,14.55 72.25,14.55 72.2,14.5 v2(72.2,14.25) v2(71.4,14.25) 71.05,14.25 70.9,14.4 69.7,14.4 69.4,14.1 69.4,13.8 ; 76.4,16 76.7,15.7 v2(78.7,15.7) 78.7,14.8 79.5,14 v2(80.3,14) ; 76.4,16 76.4,16.9 78.2,18.7 80,18.7 v2(80.4,19.1) ; 43.7,18.4 39.41,18.4 v2(39.03,18.02) ; v2(24.75,20.45) 26.95,20.45 28.2,21.7 31,21.7 32.1,20.6 34.7,20.6 35.6,19.7 35.6,18.7 35.4,18.5 ; v2(59.33,9.2) 59.32,9.21 v1(56.99,9.21) ; v2(59.33,9.2) 59.8,9.67 59.8,12.1 59.3,12.6 59.3,14.4 57.29,16.41 ; v2(59.33,9.2) 58.8,8.67 58.8,7.3 59.45,6.65 59.2,6.4 59.2,4.9 59.45,4.65 57.75,2.95 v2(52.1,2.95) 52.09,2.96 v2(44.6,2.96) ; v2(67.6,5.8) 66.8,6.6 66.8,8.4 v2(67.8,9.4) 69.1,9.4 69.4,9.7 69.4,13.8 ; v1(48.16,13.23) 48.16,14.77 v1(48.19,14.79) ; 69.4,13.8 68.7,13.8 68.5,14 66.9,14 64.49,16.41 57.29,16.41 ; 54.58,14.4 55.39,13.59 v1(55.39,13.21) ; 54.58,14.4 v1(54.58,15.58) 54.58,16.38 v1(54.6,16.4) 55.4,16.4 v1(55.41,16.41) 57.29,16.41 ; 54.58,14.4 54.2,14.4 v1(53,13.2)
  VCC-4 w0.4: 43.7,22.5 43.7,15.5 ; 43.7,15.5 43.7,11.4 45.9,9.2 47.9,9.2 48.2,8.9 48.2,8.42 v1(48.21,8.41) ; 43.7,15.5 44.41,14.79 v1(48.19,14.79) ; 35.3,8 34.7,8 33.7,9 v1(33.7,10.68) ; 35.3,8 35.3,8.1 36.6,9.4 ; 35.3,8 v2(35.3,5.6) ; v2(24.75,20.45) v2(24.75,21.15) v2(24.75,21.85) v2(24.75,22.55) v2(24.75,23.22) ; v1(41.1,10.68) 41.1,10 40.5,9.4 38.1,9.4 ; 36.6,9.4 v1(36.6,10.68) 36.6,13.8 34.79,15.61 v2(34.79,17.22) 34.79,17.89 35.4,18.5 38.55,18.5 v2(39.03,18.02) ; 36.6,9.4 38.1,9.4 ; 38.1,9.4 v1(38.1,10.68)
  BOTTOM w0.15: 50.2,17.6 50.9,17.6 51,17.7 51,18.3 50.7,18.6 C66.2 50.2,18.54 50.2,17.6 ; 50.2,17.6 v1(49.78,17.18) ; v3(49.32,23.18) 49.3,23.17 49.17,23.17 48.84,22.84 C55.2 ; v3(47.26,23.76) 47.26,23.24 v3(47.75,22.75) 47.75,22.75 48.16,22.34 C59.2
  BOTTOM w0.16: v3(55.15,22.75) 55.15,22.74 55.15,22.74 55.55,22.34 C58.2
  BOTTOM w0.18: v3(57.86,24.7) 57.86,24.7 C43.1
  BOTTOM w0.2: v1(51.4,13.2) 50.9,13.7 C76.2 ; C83.2 52.84,10.96 v1(53,10.8) ; C47.2 55.62,24.25 v3(55.15,24.25) 55.13,24.27 54.88,24.27 54.75,24.14 C39.2 ; C51.2 C50.2 ; C50.2 53.5,23.1 53.2,22.8 C56.1 ; C50.2 53.77,23.46 v3(53.88,23.35) ; C37.2 48.77,25.28 v3(48.75,25.25) ; v3(49.32,23.18) 49.35,23.22 C48.2 ; C45.2 57.74,24.58 v3(57.86,24.7) ; v1(54.6,16.4) 54.6,16.4 C67.2 ; C109.2 49.8,6.8 v1(49.84,6.84) ; C89.2 49.3,10.48 v1(48.99,10.79) ; C93.2 58,9.2 57.84,9.04 C92.2 57.16,9.04 v1(56.99,9.21) 57,9.22 C90.2 ; v3(57.15,22.75) 57.24,22.66 C35.2 ; v1(55.39,13.21) 55.56,13.38 C78.2 C73.2 ; C44.1 51.48,24.68 50.86,24.68 50.76,24.78 C46.2 50.42,24.59 50.32,24.49 v3(50.32,24.3) ; C77.2 v1(53,13.2) ; C34.1 53.2,25.5 53.46,25.24 v3(53.96,25.24) 53.98,25.26 C36.2 ; v3(56.15,25.25) 56.17,25.27 C54.2 ; C72.2 C70.2 54.44,15.44 v1(54.58,15.58) ; C68.2 56.7,16 56.46,16.24 C69.2 55.58,16.24 v1(55.41,16.41) ; v3(47.26,23.76) 47.26,24.04 C40.2 ; v1(48.16,13.23) 47.99,13.41 C79.2 47.99,14.29 C74.1 48,14.6 v1(48.19,14.79) ; v1(54.61,10.01) 54.66,10.06 C88.2 C87.2 ; C65.2 50.3,19.2 50.14,19.04 C66.2 ; v1(48.95,6.84) 49,6.8 C110.2 ; C86.2 v1(52.2,10) 52.46,9.74 C91.2 52.74,9.74 v1(53,10) ; v1(46.6,23.5) 46.52,23.5 46.48,23.46 C52.2 45.86,23.46 45.7,23.3 C49.1 ; C99.2 48.2,8.4 v1(48.21,8.41) ; C100.2 v1(53,7.6) ; C38.2 46.58,25.26 v3(46.56,25.24) 46.2,25.6 46.2,26.7
  BOTTOM w0.25: J8.11 66.65,14.25 C71.2
  BOTTOM w0.3: v2(39.03,18.02) 39.05,18 40,18 ; v2(72.2,14.25) v2(71.4,14.25) J8.11 ; C115.2 52.23,2.82 v2(52.1,2.95) ; 40,18 40.9,18.9 R54.1 ; 40,18 R57.1 ; U10.2 86.05,14.95 86.4,14.6 C80.2 ; R65.2 v1(38.1,10.68)
  BOTTOM w0.4: R44.1 58.6,27.1 58.9,26.8 C43.1 ; R47.2 46.6,27.1 46.2,26.7 C33.1 ; v2(80.3,14) 80.3,13.3 81.1,12.5 83.8,12.5 85.3,14 C80.2 ; C93.2 v2(59.33,9.2)
  BOTTOM w0.5: 53.2,27.27 C34.1 ; 53.2,27.27 54.83,27.27 R45.2 ; 53.2,27.27 50.77,27.27 R46.1
